# EAGLE board SparkFun_dToF-TMF8820_Mini-Panel (EAGLE 9.6.2), part 1 of 7
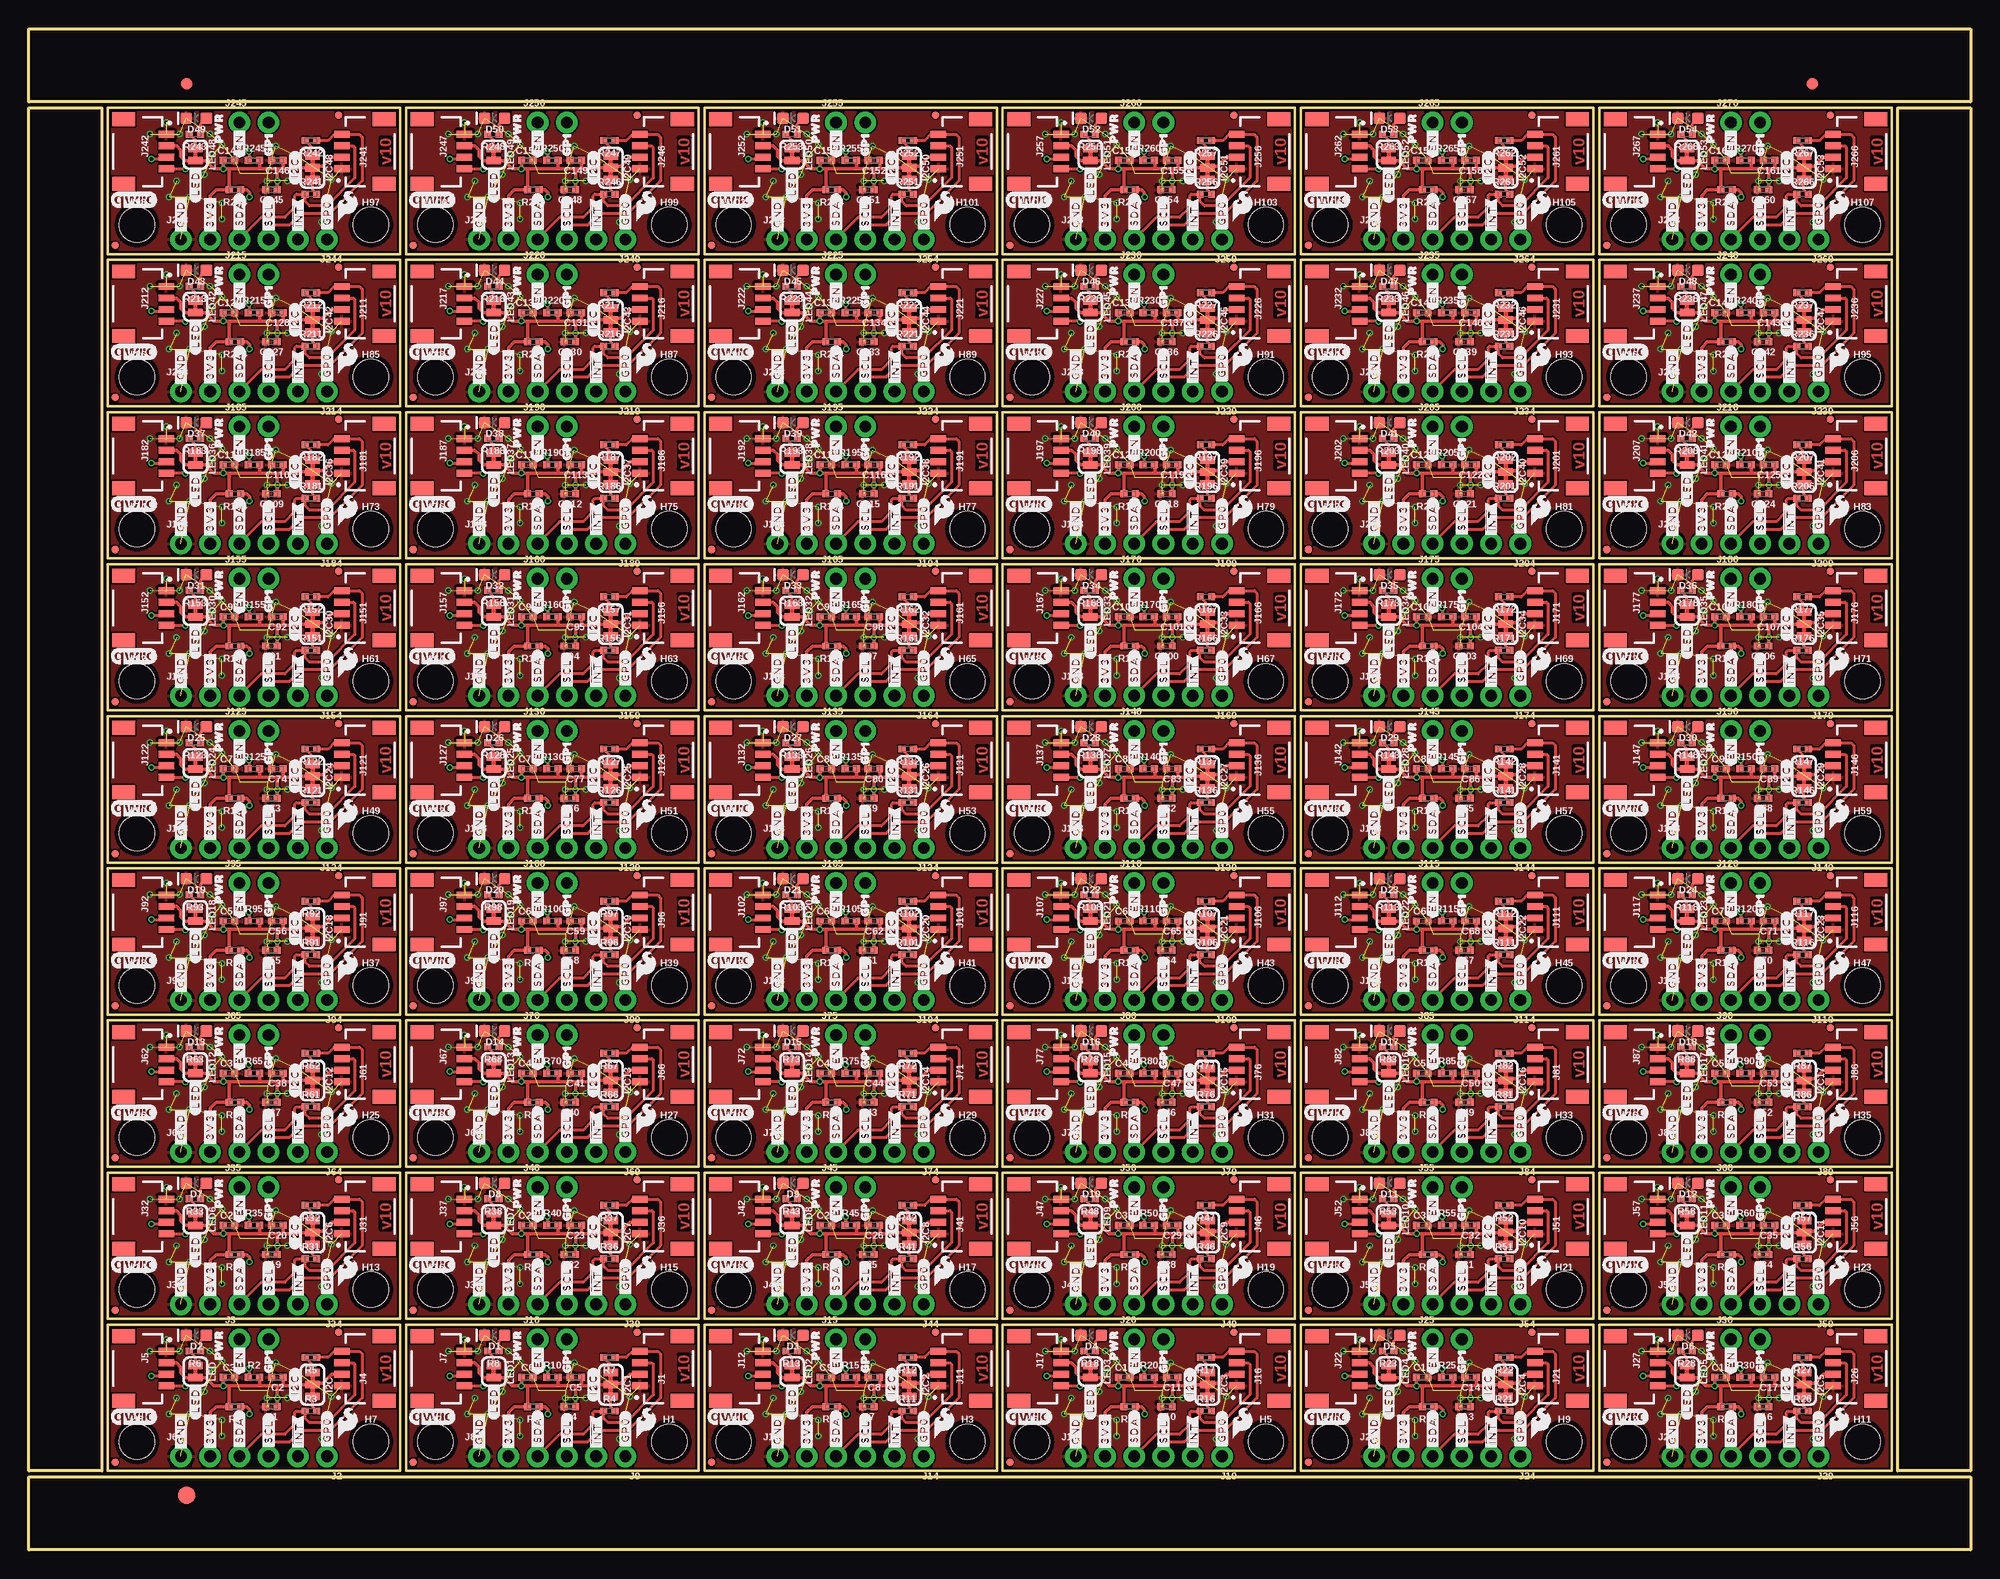
[diagram p0: board, top side]
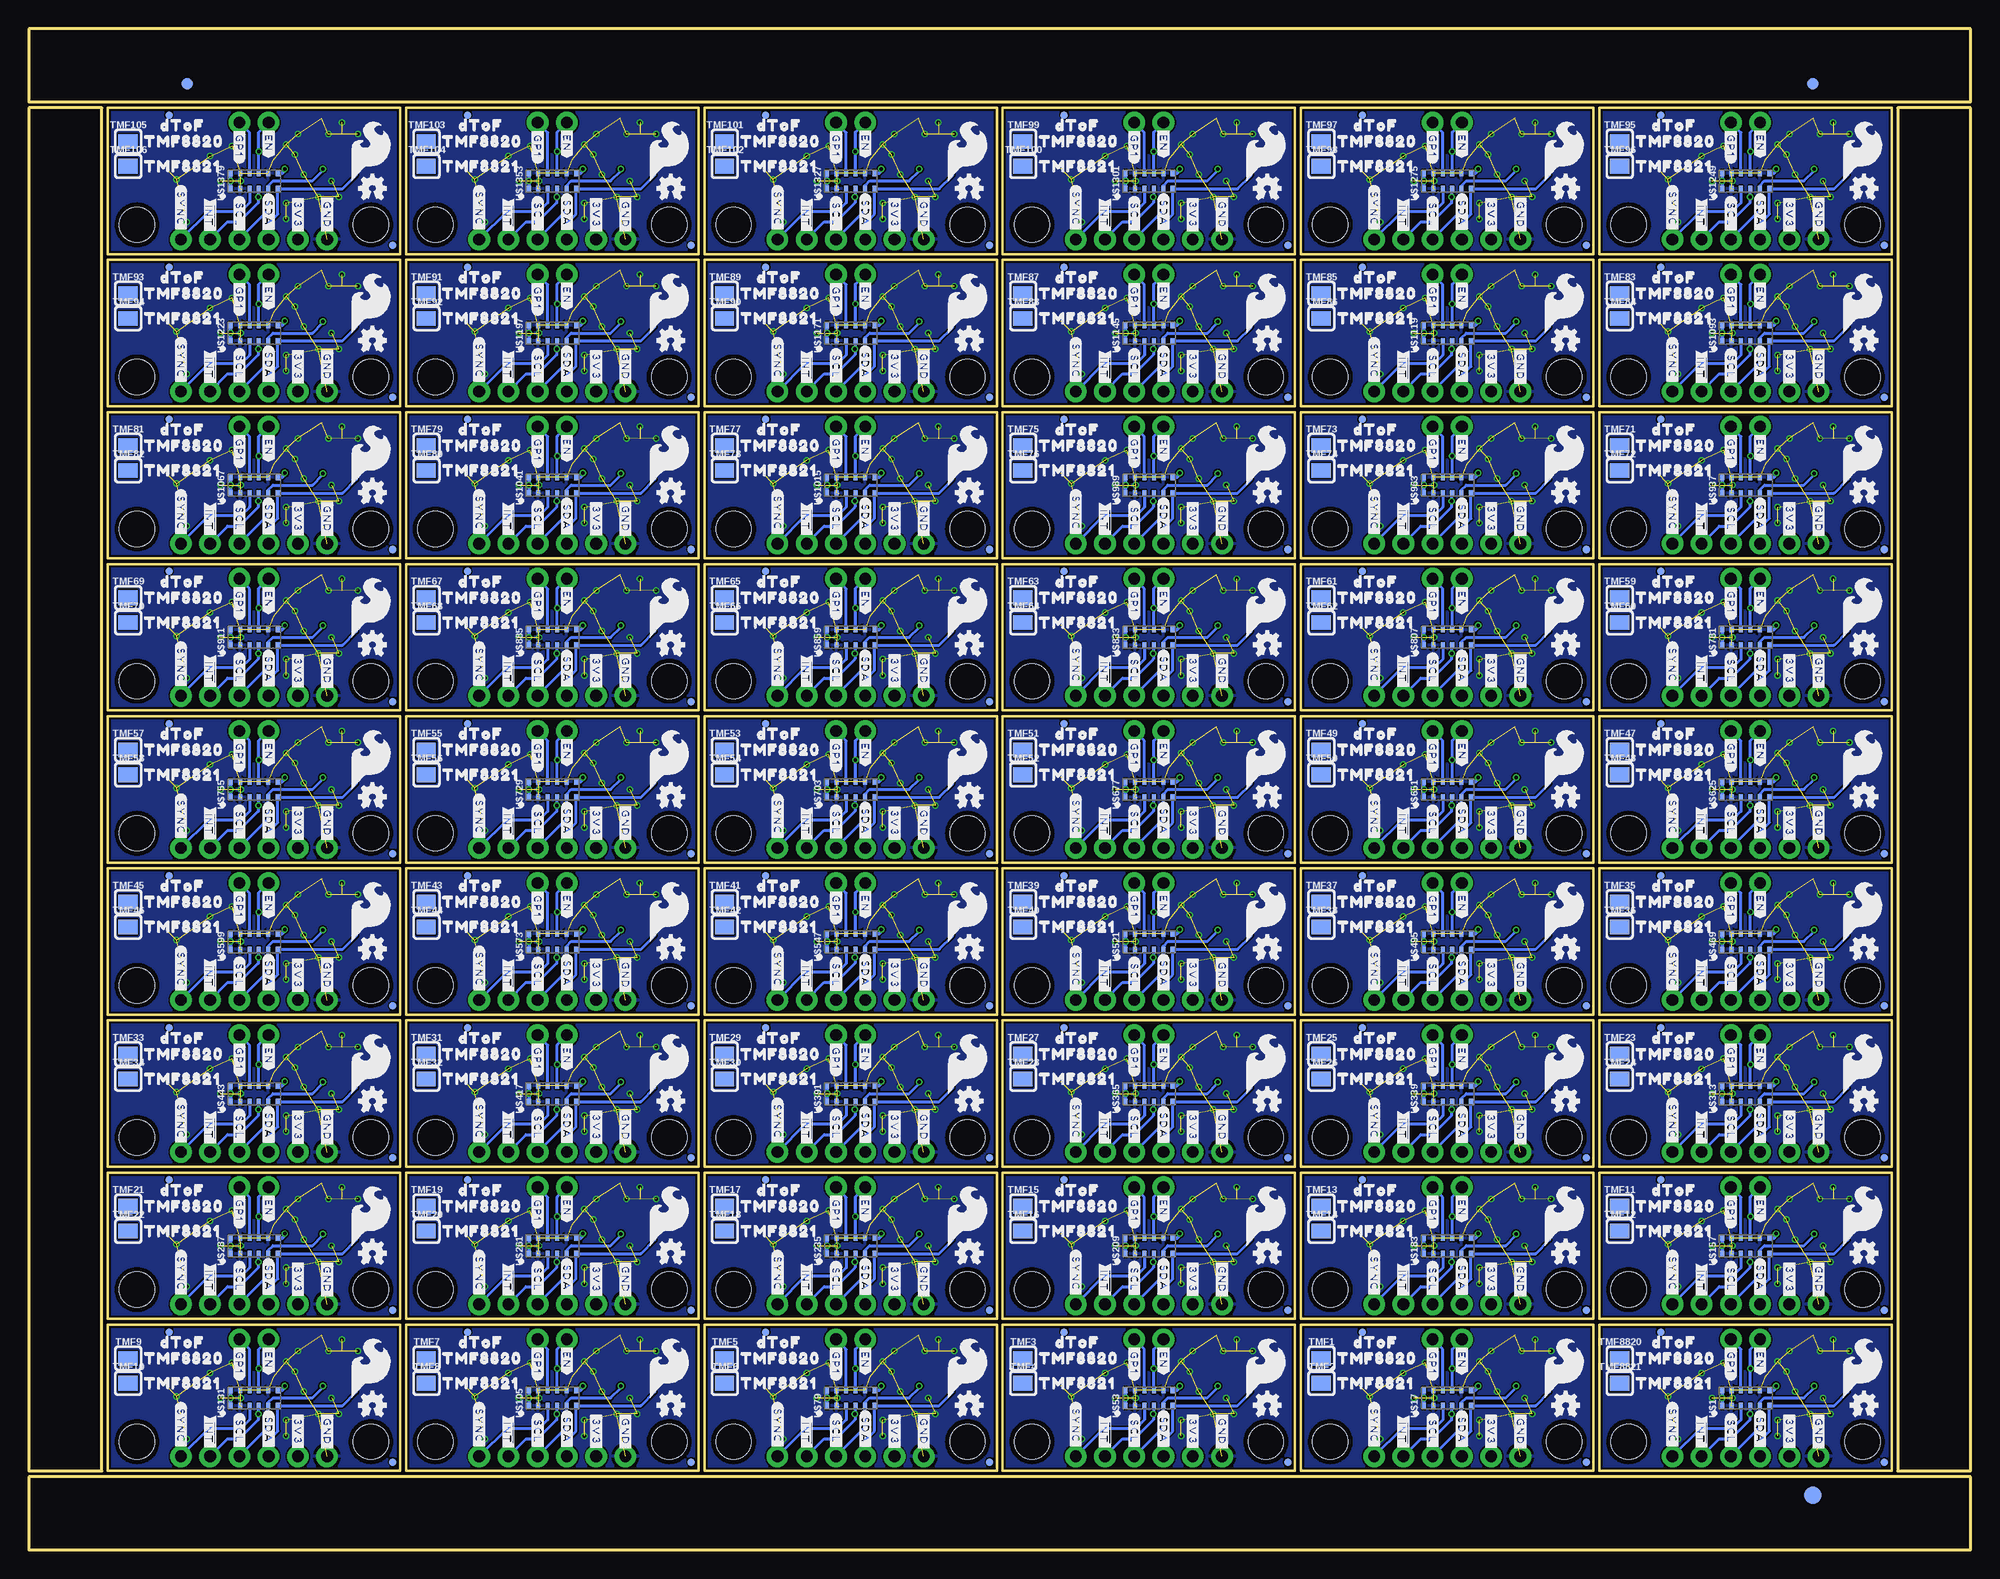
[diagram p1: board, bottom side, seen from below]

Size 168.66 x 132.08 mm. Coordinates in mm from the lower left corner, seen from the top.
Outline: 232 segments
Copper layers (1*16): Top 0.035mm / dielectric 1.5mm / Bottom 0.035mm
Design rules "SparkFun_tDof-TMF8820_Mini": minimum track width 5mil, minimum drill 0.3mm, track to track 5mil, track to pad 5mil, pad to pad 5mil, via to via 5mil, smd to smd 5mil, copper to edge 7mil, drill to drill 7mil, minimum pad ring 5mil, minimum via ring 5mil, stop-mask expansion 2.5mil, vias tented up to drill 25mil, thermal gap 10mil

## Footprints (pad centres in the part's own frame; a part is rotated, then mirrored left to right if it is on the bottom)
0402-TIGHT = smd 0.6 x 0.6: 1 -0.5,0; 2 0.5,0
LED-0603 = smd 1 x 1: A -0.877,0; C 0.877,0
FIDUCIAL-1X2 = smd 1 x 1: 1 0,0
FIDUCIAL-1.5X3 = smd 1.5 x 1.5: 1 0,0
FIDUCIAL-MICRO = smd 0.635 x 0.635: 1 0,0
STAND-OFF-TIGHT = hole 3.048: 0,0
SMT-JUMPER_3_2-NC_TRACE_SILK = smd 0.66 x 1.27: 1 -1.041,0; 2 0,0; 3 1.041,0
JST04_1MM_RA = smd 0.6 x 1.35: 1 -1.5,0; 2 -0.5,0; 3 0.5,0; 4 1.5,0 | smd 1.2 x 2: NC1 2.8,-3.675; NC2 -2.8,-3.675
1X02_NO_SILK = drill 1.016 pad 1.88: 1 0,0; 2 2.54,0
1X04_NO_SILK = drill 1.016 pad 1.88: 1 0,0; 2 2.54,0; 3 5.08,0; 4 7.62,0
SMT-JUMPER_2_NC_TRACE_SILK = smd 0.66 x 1.27: 1 -0.521,0; 2 0.521,0
PRODUCT_IDENT_PASTE_SILK = smd 1.676 x 1.27: 1 -0.025,0
PRODUCT_IDENT_NO_SILK = smd 1.676 x 1.27: 1 -0.025,0
TMF882X = smd 0.5 x 0.35: P1 -0.686,2.032; P2 -0.686,1.212; P3 -0.686,0.392; P4 -0.686,-0.428; P5 -0.686,-1.248; P6 -0.686,-2.068; P7 0.664,-2.068; P8 0.664,-1.248; P9 0.664,-0.428; P10 0.664,0.392; P11 0.664,1.212; P12 0.664,2.032

## Placement (x,y rotation side)
C1  0.1uF  [0402-TIGHT]  21.08,12.45 180 top
C2  0.1uF  [0402-TIGHT]  21.59,14.99 180 top
C3  0.1uF  [0402-TIGHT]  17.4,14.99 0 top
C4  0.1uF  [0402-TIGHT]  46.99,12.45 180 top
C5  0.1uF  [0402-TIGHT]  47.5,14.99 180 top
C6  0.1uF  [0402-TIGHT]  43.31,14.99 0 top
C7  0.1uF  [0402-TIGHT]  72.9,12.45 180 top
C8  0.1uF  [0402-TIGHT]  73.41,14.99 180 top
C9  0.1uF  [0402-TIGHT]  69.22,14.99 0 top
C10  0.1uF  [0402-TIGHT]  98.81,12.45 180 top
C11  0.1uF  [0402-TIGHT]  99.31,14.99 180 top
C12  0.1uF  [0402-TIGHT]  95.12,14.99 0 top
C13  0.1uF  [0402-TIGHT]  124.71,12.45 180 top
C14  0.1uF  [0402-TIGHT]  125.22,14.99 180 top
C15  0.1uF  [0402-TIGHT]  121.03,14.99 0 top
C16  0.1uF  [0402-TIGHT]  150.62,12.45 180 top
C17  0.1uF  [0402-TIGHT]  151.13,14.99 180 top
C18  0.1uF  [0402-TIGHT]  146.94,14.99 0 top
C19  0.1uF  [0402-TIGHT]  21.08,25.65 180 top
C20  0.1uF  [0402-TIGHT]  21.59,28.19 180 top
C21  0.1uF  [0402-TIGHT]  17.4,28.19 0 top
C22  0.1uF  [0402-TIGHT]  46.99,25.65 180 top
C23  0.1uF  [0402-TIGHT]  47.5,28.19 180 top
C24  0.1uF  [0402-TIGHT]  43.31,28.19 0 top
C25  0.1uF  [0402-TIGHT]  72.9,25.65 180 top
C26  0.1uF  [0402-TIGHT]  73.41,28.19 180 top
C27  0.1uF  [0402-TIGHT]  69.22,28.19 0 top
C28  0.1uF  [0402-TIGHT]  98.81,25.65 180 top
C29  0.1uF  [0402-TIGHT]  99.31,28.19 180 top
C30  0.1uF  [0402-TIGHT]  95.12,28.19 0 top
C31  0.1uF  [0402-TIGHT]  124.71,25.65 180 top
C32  0.1uF  [0402-TIGHT]  125.22,28.19 180 top
C33  0.1uF  [0402-TIGHT]  121.03,28.19 0 top
C34  0.1uF  [0402-TIGHT]  150.62,25.65 180 top
C35  0.1uF  [0402-TIGHT]  151.13,28.19 180 top
C36  0.1uF  [0402-TIGHT]  146.94,28.19 0 top
C37  0.1uF  [0402-TIGHT]  21.08,38.86 180 top
C38  0.1uF  [0402-TIGHT]  21.59,41.4 180 top
C39  0.1uF  [0402-TIGHT]  17.4,41.4 0 top
C40  0.1uF  [0402-TIGHT]  46.99,38.86 180 top
C41  0.1uF  [0402-TIGHT]  47.5,41.4 180 top
C42  0.1uF  [0402-TIGHT]  43.31,41.4 0 top
C43  0.1uF  [0402-TIGHT]  72.9,38.86 180 top
C44  0.1uF  [0402-TIGHT]  73.41,41.4 180 top
C45  0.1uF  [0402-TIGHT]  69.22,41.4 0 top
C46  0.1uF  [0402-TIGHT]  98.81,38.86 180 top
C47  0.1uF  [0402-TIGHT]  99.31,41.4 180 top
C48  0.1uF  [0402-TIGHT]  95.12,41.4 0 top
C49  0.1uF  [0402-TIGHT]  124.71,38.86 180 top
C50  0.1uF  [0402-TIGHT]  125.22,41.4 180 top
C51  0.1uF  [0402-TIGHT]  121.03,41.4 0 top
C52  0.1uF  [0402-TIGHT]  150.62,38.86 180 top
C53  0.1uF  [0402-TIGHT]  151.13,41.4 180 top
C54  0.1uF  [0402-TIGHT]  146.94,41.4 0 top
C55  0.1uF  [0402-TIGHT]  21.08,52.07 180 top
C56  0.1uF  [0402-TIGHT]  21.59,54.61 180 top
C57  0.1uF  [0402-TIGHT]  17.4,54.61 0 top
C58  0.1uF  [0402-TIGHT]  46.99,52.07 180 top
C59  0.1uF  [0402-TIGHT]  47.5,54.61 180 top
C60  0.1uF  [0402-TIGHT]  43.31,54.61 0 top
C61  0.1uF  [0402-TIGHT]  72.9,52.07 180 top
C62  0.1uF  [0402-TIGHT]  73.41,54.61 180 top
C63  0.1uF  [0402-TIGHT]  69.22,54.61 0 top
C64  0.1uF  [0402-TIGHT]  98.81,52.07 180 top
C65  0.1uF  [0402-TIGHT]  99.31,54.61 180 top
C66  0.1uF  [0402-TIGHT]  95.12,54.61 0 top
C67  0.1uF  [0402-TIGHT]  124.71,52.07 180 top
C68  0.1uF  [0402-TIGHT]  125.22,54.61 180 top
C69  0.1uF  [0402-TIGHT]  121.03,54.61 0 top
C70  0.1uF  [0402-TIGHT]  150.62,52.07 180 top
C71  0.1uF  [0402-TIGHT]  151.13,54.61 180 top
C72  0.1uF  [0402-TIGHT]  146.94,54.61 0 top
C73  0.1uF  [0402-TIGHT]  21.08,65.28 180 top
C74  0.1uF  [0402-TIGHT]  21.59,67.82 180 top
C75  0.1uF  [0402-TIGHT]  17.4,67.82 0 top
C76  0.1uF  [0402-TIGHT]  46.99,65.28 180 top
C77  0.1uF  [0402-TIGHT]  47.5,67.82 180 top
C78  0.1uF  [0402-TIGHT]  43.31,67.82 0 top
C79  0.1uF  [0402-TIGHT]  72.9,65.28 180 top
C80  0.1uF  [0402-TIGHT]  73.41,67.82 180 top
C81  0.1uF  [0402-TIGHT]  69.22,67.82 0 top
C82  0.1uF  [0402-TIGHT]  98.81,65.28 180 top
C83  0.1uF  [0402-TIGHT]  99.31,67.82 180 top
C84  0.1uF  [0402-TIGHT]  95.12,67.82 0 top
C85  0.1uF  [0402-TIGHT]  124.71,65.28 180 top
C86  0.1uF  [0402-TIGHT]  125.22,67.82 180 top
C87  0.1uF  [0402-TIGHT]  121.03,67.82 0 top
C88  0.1uF  [0402-TIGHT]  150.62,65.28 180 top
C89  0.1uF  [0402-TIGHT]  151.13,67.82 180 top
C90  0.1uF  [0402-TIGHT]  146.94,67.82 0 top
C91  0.1uF  [0402-TIGHT]  21.08,78.49 180 top
C92  0.1uF  [0402-TIGHT]  21.59,81.03 180 top
C93  0.1uF  [0402-TIGHT]  17.4,81.03 0 top
C94  0.1uF  [0402-TIGHT]  46.99,78.49 180 top
C95  0.1uF  [0402-TIGHT]  47.5,81.03 180 top
C96  0.1uF  [0402-TIGHT]  43.31,81.03 0 top
C97  0.1uF  [0402-TIGHT]  72.9,78.49 180 top
C98  0.1uF  [0402-TIGHT]  73.41,81.03 180 top
C99  0.1uF  [0402-TIGHT]  69.22,81.03 0 top
C100  0.1uF  [0402-TIGHT]  98.81,78.49 180 top
C101  0.1uF  [0402-TIGHT]  99.31,81.03 180 top
C102  0.1uF  [0402-TIGHT]  95.12,81.03 0 top
C103  0.1uF  [0402-TIGHT]  124.71,78.49 180 top
C104  0.1uF  [0402-TIGHT]  125.22,81.03 180 top
C105  0.1uF  [0402-TIGHT]  121.03,81.03 0 top
C106  0.1uF  [0402-TIGHT]  150.62,78.49 180 top
C107  0.1uF  [0402-TIGHT]  151.13,81.03 180 top
C108  0.1uF  [0402-TIGHT]  146.94,81.03 0 top
C109  0.1uF  [0402-TIGHT]  21.08,91.69 180 top
C110  0.1uF  [0402-TIGHT]  21.59,94.23 180 top
C111  0.1uF  [0402-TIGHT]  17.4,94.23 0 top
C112  0.1uF  [0402-TIGHT]  46.99,91.69 180 top
C113  0.1uF  [0402-TIGHT]  47.5,94.23 180 top
C114  0.1uF  [0402-TIGHT]  43.31,94.23 0 top
C115  0.1uF  [0402-TIGHT]  72.9,91.69 180 top
C116  0.1uF  [0402-TIGHT]  73.41,94.23 180 top
C117  0.1uF  [0402-TIGHT]  69.22,94.23 0 top
C118  0.1uF  [0402-TIGHT]  98.81,91.69 180 top
C119  0.1uF  [0402-TIGHT]  99.31,94.23 180 top
C120  0.1uF  [0402-TIGHT]  95.12,94.23 0 top
C121  0.1uF  [0402-TIGHT]  124.71,91.69 180 top
C122  0.1uF  [0402-TIGHT]  125.22,94.23 180 top
C123  0.1uF  [0402-TIGHT]  121.03,94.23 0 top
C124  0.1uF  [0402-TIGHT]  150.62,91.69 180 top
C125  0.1uF  [0402-TIGHT]  151.13,94.23 180 top
C126  0.1uF  [0402-TIGHT]  146.94,94.23 0 top
C127  0.1uF  [0402-TIGHT]  21.08,104.9 180 top
C128  0.1uF  [0402-TIGHT]  21.59,107.44 180 top
C129  0.1uF  [0402-TIGHT]  17.4,107.44 0 top
C130  0.1uF  [0402-TIGHT]  46.99,104.9 180 top
C131  0.1uF  [0402-TIGHT]  47.5,107.44 180 top
C132  0.1uF  [0402-TIGHT]  43.31,107.44 0 top
C133  0.1uF  [0402-TIGHT]  72.9,104.9 180 top
C134  0.1uF  [0402-TIGHT]  73.41,107.44 180 top
C135  0.1uF  [0402-TIGHT]  69.22,107.44 0 top
C136  0.1uF  [0402-TIGHT]  98.81,104.9 180 top
C137  0.1uF  [0402-TIGHT]  99.31,107.44 180 top
C138  0.1uF  [0402-TIGHT]  95.12,107.44 0 top
C139  0.1uF  [0402-TIGHT]  124.71,104.9 180 top
C140  0.1uF  [0402-TIGHT]  125.22,107.44 180 top
C141  0.1uF  [0402-TIGHT]  121.03,107.44 0 top
C142  0.1uF  [0402-TIGHT]  150.62,104.9 180 top
C143  0.1uF  [0402-TIGHT]  151.13,107.44 180 top
C144  0.1uF  [0402-TIGHT]  146.94,107.44 0 top
C145  0.1uF  [0402-TIGHT]  21.08,118.11 180 top
C146  0.1uF  [0402-TIGHT]  21.59,120.65 180 top
C147  0.1uF  [0402-TIGHT]  17.4,120.65 0 top
C148  0.1uF  [0402-TIGHT]  46.99,118.11 180 top
C149  0.1uF  [0402-TIGHT]  47.5,120.65 180 top
C150  0.1uF  [0402-TIGHT]  43.31,120.65 0 top
C151  0.1uF  [0402-TIGHT]  72.9,118.11 180 top
C152  0.1uF  [0402-TIGHT]  73.41,120.65 180 top
C153  0.1uF  [0402-TIGHT]  69.22,120.65 0 top
C154  0.1uF  [0402-TIGHT]  98.81,118.11 180 top
C155  0.1uF  [0402-TIGHT]  99.31,120.65 180 top
C156  0.1uF  [0402-TIGHT]  95.12,120.65 0 top
C157  0.1uF  [0402-TIGHT]  124.71,118.11 180 top
C158  0.1uF  [0402-TIGHT]  125.22,120.65 180 top
C159  0.1uF  [0402-TIGHT]  121.03,120.65 0 top
C160  0.1uF  [0402-TIGHT]  150.62,118.11 180 top
C161  0.1uF  [0402-TIGHT]  151.13,120.65 180 top
C162  0.1uF  [0402-TIGHT]  146.94,120.65 0 top
D1  RED  [LED-0603]  40.46,18.64 180 top
D2  RED  [LED-0603]  14.55,18.64 180 top
D3  RED  [LED-0603]  66.37,18.64 180 top
D4  RED  [LED-0603]  92.28,18.64 180 top
D5  RED  [LED-0603]  118.19,18.64 180 top
D6  RED  [LED-0603]  144.09,18.64 180 top
D7  RED  [LED-0603]  14.55,31.85 180 top
D8  RED  [LED-0603]  40.46,31.85 180 top
D9  RED  [LED-0603]  66.37,31.85 180 top
D10  RED  [LED-0603]  92.28,31.85 180 top
D11  RED  [LED-0603]  118.19,31.85 180 top
D12  RED  [LED-0603]  144.09,31.85 180 top
D13  RED  [LED-0603]  14.55,45.06 180 top
D14  RED  [LED-0603]  40.46,45.06 180 top
D15  RED  [LED-0603]  66.37,45.06 180 top
D16  RED  [LED-0603]  92.28,45.06 180 top
D17  RED  [LED-0603]  118.19,45.06 180 top
D18  RED  [LED-0603]  144.09,45.06 180 top
D19  RED  [LED-0603]  14.55,58.27 180 top
D20  RED  [LED-0603]  40.46,58.27 180 top
D21  RED  [LED-0603]  66.37,58.27 180 top
D22  RED  [LED-0603]  92.28,58.27 180 top
D23  RED  [LED-0603]  118.19,58.27 180 top
D24  RED  [LED-0603]  144.09,58.27 180 top
D25  RED  [LED-0603]  14.55,71.48 180 top
D26  RED  [LED-0603]  40.46,71.48 180 top
D27  RED  [LED-0603]  66.37,71.48 180 top
D28  RED  [LED-0603]  92.28,71.48 180 top
D29  RED  [LED-0603]  118.19,71.48 180 top
D30  RED  [LED-0603]  144.09,71.48 180 top
D31  RED  [LED-0603]  14.55,84.68 180 top
D32  RED  [LED-0603]  40.46,84.68 180 top
D33  RED  [LED-0603]  66.37,84.68 180 top
D34  RED  [LED-0603]  92.28,84.68 180 top
D35  RED  [LED-0603]  118.19,84.68 180 top
D36  RED  [LED-0603]  144.09,84.68 180 top
D37  RED  [LED-0603]  14.55,97.89 180 top
D38  RED  [LED-0603]  40.46,97.89 180 top
D39  RED  [LED-0603]  66.37,97.89 180 top
D40  RED  [LED-0603]  92.28,97.89 180 top
D41  RED  [LED-0603]  118.19,97.89 180 top
D42  RED  [LED-0603]  144.09,97.89 180 top
D43  RED  [LED-0603]  14.55,111.1 180 top
D44  RED  [LED-0603]  40.46,111.1 180 top
D45  RED  [LED-0603]  66.37,111.1 180 top
D46  RED  [LED-0603]  92.28,111.1 180 top
D47  RED  [LED-0603]  118.19,111.1 180 top
D48  RED  [LED-0603]  144.09,111.1 180 top
D49  RED  [LED-0603]  14.55,124.31 180 top
D50  RED  [LED-0603]  40.46,124.31 180 top
D51  RED  [LED-0603]  66.37,124.31 180 top
D52  RED  [LED-0603]  92.28,124.31 180 top
D53  RED  [LED-0603]  118.19,124.31 180 top
D54  RED  [LED-0603]  144.09,124.31 180 top
E$1  [FIDUCIAL-1X2]  13.72,127.32 0 top
E$2  [FIDUCIAL-1X2]  13.72,127.32 0 bottom
E$3  [FIDUCIAL-1X2]  154.88,127.32 0 top
E$4  [FIDUCIAL-1X2]  154.88,127.32 0 bottom
E$5  [FIDUCIAL-1.5X3]  13.72,4.76 0 top
E$6  [FIDUCIAL-1.5X3]  13.72,4.76 0 bottom
FD1  FIDUCIALUFIDUCIAL  [FIDUCIAL-MICRO]  52.83,18.92 0 bottom
FD2  FIDUCIALUFIDUCIAL  [FIDUCIAL-MICRO]  33.4,7.62 0 bottom
FD3  FIDUCIALUFIDUCIAL  [FIDUCIAL-MICRO]  33.4,7.62 0 top
FD4  FIDUCIALUFIDUCIAL  [FIDUCIAL-MICRO]  52.83,18.92 0 top
FD5  FIDUCIALUFIDUCIAL  [FIDUCIAL-MICRO]  26.92,18.92 0 bottom
FD6  FIDUCIALUFIDUCIAL  [FIDUCIAL-MICRO]  7.49,7.62 0 bottom
FD7  FIDUCIALUFIDUCIAL  [FIDUCIAL-MICRO]  7.49,7.62 0 top
FD8  FIDUCIALUFIDUCIAL  [FIDUCIAL-MICRO]  26.92,18.92 0 top
FD9  FIDUCIALUFIDUCIAL  [FIDUCIAL-MICRO]  78.74,18.92 0 bottom
FD10  FIDUCIALUFIDUCIAL  [FIDUCIAL-MICRO]  59.31,7.62 0 bottom
FD11  FIDUCIALUFIDUCIAL  [FIDUCIAL-MICRO]  59.31,7.62 0 top
FD12  FIDUCIALUFIDUCIAL  [FIDUCIAL-MICRO]  78.74,18.92 0 top
FD13  FIDUCIALUFIDUCIAL  [FIDUCIAL-MICRO]  104.65,18.92 0 bottom
FD14  FIDUCIALUFIDUCIAL  [FIDUCIAL-MICRO]  85.22,7.62 0 bottom
FD15  FIDUCIALUFIDUCIAL  [FIDUCIAL-MICRO]  85.22,7.62 0 top
FD16  FIDUCIALUFIDUCIAL  [FIDUCIAL-MICRO]  104.65,18.92 0 top
FD17  FIDUCIALUFIDUCIAL  [FIDUCIAL-MICRO]  130.56,18.92 0 bottom
FD18  FIDUCIALUFIDUCIAL  [FIDUCIAL-MICRO]  111.12,7.62 0 bottom
FD19  FIDUCIALUFIDUCIAL  [FIDUCIAL-MICRO]  111.12,7.62 0 top
FD20  FIDUCIALUFIDUCIAL  [FIDUCIAL-MICRO]  130.56,18.92 0 top
FD21  FIDUCIALUFIDUCIAL  [FIDUCIAL-MICRO]  156.46,18.92 0 bottom
FD22  FIDUCIALUFIDUCIAL  [FIDUCIAL-MICRO]  137.03,7.62 0 bottom
FD23  FIDUCIALUFIDUCIAL  [FIDUCIAL-MICRO]  137.03,7.62 0 top
FD24  FIDUCIALUFIDUCIAL  [FIDUCIAL-MICRO]  156.46,18.92 0 top
FD25  FIDUCIALUFIDUCIAL  [FIDUCIAL-MICRO]  26.92,32.13 0 bottom
FD26  FIDUCIALUFIDUCIAL  [FIDUCIAL-MICRO]  7.49,20.83 0 bottom
FD27  FIDUCIALUFIDUCIAL  [FIDUCIAL-MICRO]  7.49,20.83 0 top
FD28  FIDUCIALUFIDUCIAL  [FIDUCIAL-MICRO]  26.92,32.13 0 top
FD29  FIDUCIALUFIDUCIAL  [FIDUCIAL-MICRO]  52.83,32.13 0 bottom
FD30  FIDUCIALUFIDUCIAL  [FIDUCIAL-MICRO]  33.4,20.83 0 bottom
FD31  FIDUCIALUFIDUCIAL  [FIDUCIAL-MICRO]  33.4,20.83 0 top
FD32  FIDUCIALUFIDUCIAL  [FIDUCIAL-MICRO]  52.83,32.13 0 top
FD33  FIDUCIALUFIDUCIAL  [FIDUCIAL-MICRO]  78.74,32.13 0 bottom
FD34  FIDUCIALUFIDUCIAL  [FIDUCIAL-MICRO]  59.31,20.83 0 bottom
FD35  FIDUCIALUFIDUCIAL  [FIDUCIAL-MICRO]  59.31,20.83 0 top
FD36  FIDUCIALUFIDUCIAL  [FIDUCIAL-MICRO]  78.74,32.13 0 top
FD37  FIDUCIALUFIDUCIAL  [FIDUCIAL-MICRO]  104.65,32.13 0 bottom
FD38  FIDUCIALUFIDUCIAL  [FIDUCIAL-MICRO]  85.22,20.83 0 bottom
FD39  FIDUCIALUFIDUCIAL  [FIDUCIAL-MICRO]  85.22,20.83 0 top
FD40  FIDUCIALUFIDUCIAL  [FIDUCIAL-MICRO]  104.65,32.13 0 top
FD41  FIDUCIALUFIDUCIAL  [FIDUCIAL-MICRO]  130.56,32.13 0 bottom
FD42  FIDUCIALUFIDUCIAL  [FIDUCIAL-MICRO]  111.12,20.83 0 bottom
FD43  FIDUCIALUFIDUCIAL  [FIDUCIAL-MICRO]  111.12,20.83 0 top
FD44  FIDUCIALUFIDUCIAL  [FIDUCIAL-MICRO]  130.56,32.13 0 top
FD45  FIDUCIALUFIDUCIAL  [FIDUCIAL-MICRO]  156.46,32.13 0 bottom
FD46  FIDUCIALUFIDUCIAL  [FIDUCIAL-MICRO]  137.03,20.83 0 bottom
FD47  FIDUCIALUFIDUCIAL  [FIDUCIAL-MICRO]  137.03,20.83 0 top
FD48  FIDUCIALUFIDUCIAL  [FIDUCIAL-MICRO]  156.46,32.13 0 top
FD49  FIDUCIALUFIDUCIAL  [FIDUCIAL-MICRO]  26.92,45.34 0 bottom
FD50  FIDUCIALUFIDUCIAL  [FIDUCIAL-MICRO]  7.49,34.04 0 bottom
FD51  FIDUCIALUFIDUCIAL  [FIDUCIAL-MICRO]  7.49,34.04 0 top
FD52  FIDUCIALUFIDUCIAL  [FIDUCIAL-MICRO]  26.92,45.34 0 top
FD53  FIDUCIALUFIDUCIAL  [FIDUCIAL-MICRO]  52.83,45.34 0 bottom
FD54  FIDUCIALUFIDUCIAL  [FIDUCIAL-MICRO]  33.4,34.04 0 bottom
FD55  FIDUCIALUFIDUCIAL  [FIDUCIAL-MICRO]  33.4,34.04 0 top
FD56  FIDUCIALUFIDUCIAL  [FIDUCIAL-MICRO]  52.83,45.34 0 top
FD57  FIDUCIALUFIDUCIAL  [FIDUCIAL-MICRO]  78.74,45.34 0 bottom
FD58  FIDUCIALUFIDUCIAL  [FIDUCIAL-MICRO]  59.31,34.04 0 bottom
FD59  FIDUCIALUFIDUCIAL  [FIDUCIAL-MICRO]  59.31,34.04 0 top
FD60  FIDUCIALUFIDUCIAL  [FIDUCIAL-MICRO]  78.74,45.34 0 top
FD61  FIDUCIALUFIDUCIAL  [FIDUCIAL-MICRO]  104.65,45.34 0 bottom
FD62  FIDUCIALUFIDUCIAL  [FIDUCIAL-MICRO]  85.22,34.04 0 bottom
FD63  FIDUCIALUFIDUCIAL  [FIDUCIAL-MICRO]  85.22,34.04 0 top
FD64  FIDUCIALUFIDUCIAL  [FIDUCIAL-MICRO]  104.65,45.34 0 top
FD65  FIDUCIALUFIDUCIAL  [FIDUCIAL-MICRO]  130.56,45.34 0 bottom
FD66  FIDUCIALUFIDUCIAL  [FIDUCIAL-MICRO]  111.12,34.04 0 bottom
FD67  FIDUCIALUFIDUCIAL  [FIDUCIAL-MICRO]  111.12,34.04 0 top
FD68  FIDUCIALUFIDUCIAL  [FIDUCIAL-MICRO]  130.56,45.34 0 top
FD69  FIDUCIALUFIDUCIAL  [FIDUCIAL-MICRO]  156.46,45.34 0 bottom
FD70  FIDUCIALUFIDUCIAL  [FIDUCIAL-MICRO]  137.03,34.04 0 bottom
FD71  FIDUCIALUFIDUCIAL  [FIDUCIAL-MICRO]  137.03,34.04 0 top
FD72  FIDUCIALUFIDUCIAL  [FIDUCIAL-MICRO]  156.46,45.34 0 top
FD73  FIDUCIALUFIDUCIAL  [FIDUCIAL-MICRO]  26.92,58.55 0 bottom
FD74  FIDUCIALUFIDUCIAL  [FIDUCIAL-MICRO]  7.49,47.24 0 bottom
FD75  FIDUCIALUFIDUCIAL  [FIDUCIAL-MICRO]  7.49,47.24 0 top
FD76  FIDUCIALUFIDUCIAL  [FIDUCIAL-MICRO]  26.92,58.55 0 top
FD77  FIDUCIALUFIDUCIAL  [FIDUCIAL-MICRO]  52.83,58.55 0 bottom
FD78  FIDUCIALUFIDUCIAL  [FIDUCIAL-MICRO]  33.4,47.24 0 bottom
FD79  FIDUCIALUFIDUCIAL  [FIDUCIAL-MICRO]  33.4,47.24 0 top
FD80  FIDUCIALUFIDUCIAL  [FIDUCIAL-MICRO]  52.83,58.55 0 top
FD81  FIDUCIALUFIDUCIAL  [FIDUCIAL-MICRO]  78.74,58.55 0 bottom
FD82  FIDUCIALUFIDUCIAL  [FIDUCIAL-MICRO]  59.31,47.24 0 bottom
FD83  FIDUCIALUFIDUCIAL  [FIDUCIAL-MICRO]  59.31,47.24 0 top
FD84  FIDUCIALUFIDUCIAL  [FIDUCIAL-MICRO]  78.74,58.55 0 top
FD85  FIDUCIALUFIDUCIAL  [FIDUCIAL-MICRO]  104.65,58.55 0 bottom
FD86  FIDUCIALUFIDUCIAL  [FIDUCIAL-MICRO]  85.22,47.24 0 bottom
FD87  FIDUCIALUFIDUCIAL  [FIDUCIAL-MICRO]  85.22,47.24 0 top
FD88  FIDUCIALUFIDUCIAL  [FIDUCIAL-MICRO]  104.65,58.55 0 top
FD89  FIDUCIALUFIDUCIAL  [FIDUCIAL-MICRO]  130.56,58.55 0 bottom
FD90  FIDUCIALUFIDUCIAL  [FIDUCIAL-MICRO]  111.12,47.24 0 bottom
FD91  FIDUCIALUFIDUCIAL  [FIDUCIAL-MICRO]  111.12,47.24 0 top
FD92  FIDUCIALUFIDUCIAL  [FIDUCIAL-MICRO]  130.56,58.55 0 top
FD93  FIDUCIALUFIDUCIAL  [FIDUCIAL-MICRO]  156.46,58.55 0 bottom
FD94  FIDUCIALUFIDUCIAL  [FIDUCIAL-MICRO]  137.03,47.24 0 bottom
FD95  FIDUCIALUFIDUCIAL  [FIDUCIAL-MICRO]  137.03,47.24 0 top
FD96  FIDUCIALUFIDUCIAL  [FIDUCIAL-MICRO]  156.46,58.55 0 top
FD97  FIDUCIALUFIDUCIAL  [FIDUCIAL-MICRO]  26.92,71.76 0 bottom
FD98  FIDUCIALUFIDUCIAL  [FIDUCIAL-MICRO]  7.49,60.45 0 bottom
FD99  FIDUCIALUFIDUCIAL  [FIDUCIAL-MICRO]  7.49,60.45 0 top
FD100  FIDUCIALUFIDUCIAL  [FIDUCIAL-MICRO]  26.92,71.76 0 top
FD101  FIDUCIALUFIDUCIAL  [FIDUCIAL-MICRO]  52.83,71.76 0 bottom
FD102  FIDUCIALUFIDUCIAL  [FIDUCIAL-MICRO]  33.4,60.45 0 bottom
FD103  FIDUCIALUFIDUCIAL  [FIDUCIAL-MICRO]  33.4,60.45 0 top
FD104  FIDUCIALUFIDUCIAL  [FIDUCIAL-MICRO]  52.83,71.76 0 top
FD105  FIDUCIALUFIDUCIAL  [FIDUCIAL-MICRO]  78.74,71.76 0 bottom
FD106  FIDUCIALUFIDUCIAL  [FIDUCIAL-MICRO]  59.31,60.45 0 bottom
FD107  FIDUCIALUFIDUCIAL  [FIDUCIAL-MICRO]  59.31,60.45 0 top
FD108  FIDUCIALUFIDUCIAL  [FIDUCIAL-MICRO]  78.74,71.76 0 top
FD109  FIDUCIALUFIDUCIAL  [FIDUCIAL-MICRO]  104.65,71.76 0 bottom
FD110  FIDUCIALUFIDUCIAL  [FIDUCIAL-MICRO]  85.22,60.45 0 bottom
FD111  FIDUCIALUFIDUCIAL  [FIDUCIAL-MICRO]  85.22,60.45 0 top
FD112  FIDUCIALUFIDUCIAL  [FIDUCIAL-MICRO]  104.65,71.76 0 top
FD113  FIDUCIALUFIDUCIAL  [FIDUCIAL-MICRO]  130.56,71.76 0 bottom
FD114  FIDUCIALUFIDUCIAL  [FIDUCIAL-MICRO]  111.12,60.45 0 bottom
FD115  FIDUCIALUFIDUCIAL  [FIDUCIAL-MICRO]  111.12,60.45 0 top
FD116  FIDUCIALUFIDUCIAL  [FIDUCIAL-MICRO]  130.56,71.76 0 top
FD117  FIDUCIALUFIDUCIAL  [FIDUCIAL-MICRO]  156.46,71.76 0 bottom
FD118  FIDUCIALUFIDUCIAL  [FIDUCIAL-MICRO]  137.03,60.45 0 bottom
FD119  FIDUCIALUFIDUCIAL  [FIDUCIAL-MICRO]  137.03,60.45 0 top
FD120  FIDUCIALUFIDUCIAL  [FIDUCIAL-MICRO]  156.46,71.76 0 top
FD121  FIDUCIALUFIDUCIAL  [FIDUCIAL-MICRO]  26.92,84.96 0 bottom
FD122  FIDUCIALUFIDUCIAL  [FIDUCIAL-MICRO]  7.49,73.66 0 bottom
FD123  FIDUCIALUFIDUCIAL  [FIDUCIAL-MICRO]  7.49,73.66 0 top
FD124  FIDUCIALUFIDUCIAL  [FIDUCIAL-MICRO]  26.92,84.96 0 top
FD125  FIDUCIALUFIDUCIAL  [FIDUCIAL-MICRO]  52.83,84.96 0 bottom
FD126  FIDUCIALUFIDUCIAL  [FIDUCIAL-MICRO]  33.4,73.66 0 bottom
FD127  FIDUCIALUFIDUCIAL  [FIDUCIAL-MICRO]  33.4,73.66 0 top
FD128  FIDUCIALUFIDUCIAL  [FIDUCIAL-MICRO]  52.83,84.96 0 top
FD129  FIDUCIALUFIDUCIAL  [FIDUCIAL-MICRO]  78.74,84.96 0 bottom
FD130  FIDUCIALUFIDUCIAL  [FIDUCIAL-MICRO]  59.31,73.66 0 bottom
FD131  FIDUCIALUFIDUCIAL  [FIDUCIAL-MICRO]  59.31,73.66 0 top
FD132  FIDUCIALUFIDUCIAL  [FIDUCIAL-MICRO]  78.74,84.96 0 top
FD133  FIDUCIALUFIDUCIAL  [FIDUCIAL-MICRO]  104.65,84.96 0 bottom
FD134  FIDUCIALUFIDUCIAL  [FIDUCIAL-MICRO]  85.22,73.66 0 bottom
FD135  FIDUCIALUFIDUCIAL  [FIDUCIAL-MICRO]  85.22,73.66 0 top
FD136  FIDUCIALUFIDUCIAL  [FIDUCIAL-MICRO]  104.65,84.96 0 top
FD137  FIDUCIALUFIDUCIAL  [FIDUCIAL-MICRO]  130.56,84.96 0 bottom
FD138  FIDUCIALUFIDUCIAL  [FIDUCIAL-MICRO]  111.12,73.66 0 bottom
FD139  FIDUCIALUFIDUCIAL  [FIDUCIAL-MICRO]  111.12,73.66 0 top
FD140  FIDUCIALUFIDUCIAL  [FIDUCIAL-MICRO]  130.56,84.96 0 top
FD141  FIDUCIALUFIDUCIAL  [FIDUCIAL-MICRO]  156.46,84.96 0 bottom
FD142  FIDUCIALUFIDUCIAL  [FIDUCIAL-MICRO]  137.03,73.66 0 bottom
FD143  FIDUCIALUFIDUCIAL  [FIDUCIAL-MICRO]  137.03,73.66 0 top
FD144  FIDUCIALUFIDUCIAL  [FIDUCIAL-MICRO]  156.46,84.96 0 top
FD145  FIDUCIALUFIDUCIAL  [FIDUCIAL-MICRO]  26.92,98.17 0 bottom
FD146  FIDUCIALUFIDUCIAL  [FIDUCIAL-MICRO]  7.49,86.87 0 bottom
FD147  FIDUCIALUFIDUCIAL  [FIDUCIAL-MICRO]  7.49,86.87 0 top
FD148  FIDUCIALUFIDUCIAL  [FIDUCIAL-MICRO]  26.92,98.17 0 top
FD149  FIDUCIALUFIDUCIAL  [FIDUCIAL-MICRO]  52.83,98.17 0 bottom
FD150  FIDUCIALUFIDUCIAL  [FIDUCIAL-MICRO]  33.4,86.87 0 bottom
FD151  FIDUCIALUFIDUCIAL  [FIDUCIAL-MICRO]  33.4,86.87 0 top
FD152  FIDUCIALUFIDUCIAL  [FIDUCIAL-MICRO]  52.83,98.17 0 top
FD153  FIDUCIALUFIDUCIAL  [FIDUCIAL-MICRO]  78.74,98.17 0 bottom
FD154  FIDUCIALUFIDUCIAL  [FIDUCIAL-MICRO]  59.31,86.87 0 bottom
FD155  FIDUCIALUFIDUCIAL  [FIDUCIAL-MICRO]  59.31,86.87 0 top
FD156  FIDUCIALUFIDUCIAL  [FIDUCIAL-MICRO]  78.74,98.17 0 top
FD157  FIDUCIALUFIDUCIAL  [FIDUCIAL-MICRO]  104.65,98.17 0 bottom
FD158  FIDUCIALUFIDUCIAL  [FIDUCIAL-MICRO]  85.22,86.87 0 bottom
FD159  FIDUCIALUFIDUCIAL  [FIDUCIAL-MICRO]  85.22,86.87 0 top
FD160  FIDUCIALUFIDUCIAL  [FIDUCIAL-MICRO]  104.65,98.17 0 top
FD161  FIDUCIALUFIDUCIAL  [FIDUCIAL-MICRO]  130.56,98.17 0 bottom
FD162  FIDUCIALUFIDUCIAL  [FIDUCIAL-MICRO]  111.12,86.87 0 bottom
FD163  FIDUCIALUFIDUCIAL  [FIDUCIAL-MICRO]  111.12,86.87 0 top
FD164  FIDUCIALUFIDUCIAL  [FIDUCIAL-MICRO]  130.56,98.17 0 top
FD165  FIDUCIALUFIDUCIAL  [FIDUCIAL-MICRO]  156.46,98.17 0 bottom
FD166  FIDUCIALUFIDUCIAL  [FIDUCIAL-MICRO]  137.03,86.87 0 bottom
FD167  FIDUCIALUFIDUCIAL  [FIDUCIAL-MICRO]  137.03,86.87 0 top
FD168  FIDUCIALUFIDUCIAL  [FIDUCIAL-MICRO]  156.46,98.17 0 top
FD169  FIDUCIALUFIDUCIAL  [FIDUCIAL-MICRO]  26.92,111.38 0 bottom
FD170  FIDUCIALUFIDUCIAL  [FIDUCIAL-MICRO]  7.49,100.08 0 bottom
FD171  FIDUCIALUFIDUCIAL  [FIDUCIAL-MICRO]  7.49,100.08 0 top
FD172  FIDUCIALUFIDUCIAL  [FIDUCIAL-MICRO]  26.92,111.38 0 top
FD173  FIDUCIALUFIDUCIAL  [FIDUCIAL-MICRO]  52.83,111.38 0 bottom
FD174  FIDUCIALUFIDUCIAL  [FIDUCIAL-MICRO]  33.4,100.08 0 bottom
FD175  FIDUCIALUFIDUCIAL  [FIDUCIAL-MICRO]  33.4,100.08 0 top
FD176  FIDUCIALUFIDUCIAL  [FIDUCIAL-MICRO]  52.83,111.38 0 top
FD177  FIDUCIALUFIDUCIAL  [FIDUCIAL-MICRO]  78.74,111.38 0 bottom
FD178  FIDUCIALUFIDUCIAL  [FIDUCIAL-MICRO]  59.31,100.08 0 bottom
FD179  FIDUCIALUFIDUCIAL  [FIDUCIAL-MICRO]  59.31,100.08 0 top
FD180  FIDUCIALUFIDUCIAL  [FIDUCIAL-MICRO]  78.74,111.38 0 top
FD181  FIDUCIALUFIDUCIAL  [FIDUCIAL-MICRO]  104.65,111.38 0 bottom
FD182  FIDUCIALUFIDUCIAL  [FIDUCIAL-MICRO]  85.22,100.08 0 bottom
FD183  FIDUCIALUFIDUCIAL  [FIDUCIAL-MICRO]  85.22,100.08 0 top
FD184  FIDUCIALUFIDUCIAL  [FIDUCIAL-MICRO]  104.65,111.38 0 top
FD185  FIDUCIALUFIDUCIAL  [FIDUCIAL-MICRO]  130.56,111.38 0 bottom
FD186  FIDUCIALUFIDUCIAL  [FIDUCIAL-MICRO]  111.12,100.08 0 bottom
FD187  FIDUCIALUFIDUCIAL  [FIDUCIAL-MICRO]  111.12,100.08 0 top
FD188  FIDUCIALUFIDUCIAL  [FIDUCIAL-MICRO]  130.56,111.38 0 top
FD189  FIDUCIALUFIDUCIAL  [FIDUCIAL-MICRO]  156.46,111.38 0 bottom
FD190  FIDUCIALUFIDUCIAL  [FIDUCIAL-MICRO]  137.03,100.08 0 bottom
FD191  FIDUCIALUFIDUCIAL  [FIDUCIAL-MICRO]  137.03,100.08 0 top
FD192  FIDUCIALUFIDUCIAL  [FIDUCIAL-MICRO]  156.46,111.38 0 top
FD193  FIDUCIALUFIDUCIAL  [FIDUCIAL-MICRO]  26.92,124.59 0 bottom
FD194  FIDUCIALUFIDUCIAL  [FIDUCIAL-MICRO]  7.49,113.28 0 bottom
FD195  FIDUCIALUFIDUCIAL  [FIDUCIAL-MICRO]  7.49,113.28 0 top
FD196  FIDUCIALUFIDUCIAL  [FIDUCIAL-MICRO]  26.92,124.59 0 top
FD197  FIDUCIALUFIDUCIAL  [FIDUCIAL-MICRO]  52.83,124.59 0 bottom
FD198  FIDUCIALUFIDUCIAL  [FIDUCIAL-MICRO]  33.4,113.28 0 bottom
FD199  FIDUCIALUFIDUCIAL  [FIDUCIAL-MICRO]  33.4,113.28 0 top
FD200  FIDUCIALUFIDUCIAL  [FIDUCIAL-MICRO]  52.83,124.59 0 top
FD201  FIDUCIALUFIDUCIAL  [FIDUCIAL-MICRO]  78.74,124.59 0 bottom
FD202  FIDUCIALUFIDUCIAL  [FIDUCIAL-MICRO]  59.31,113.28 0 bottom
FD203  FIDUCIALUFIDUCIAL  [FIDUCIAL-MICRO]  59.31,113.28 0 top
FD204  FIDUCIALUFIDUCIAL  [FIDUCIAL-MICRO]  78.74,124.59 0 top
FD205  FIDUCIALUFIDUCIAL  [FIDUCIAL-MICRO]  104.65,124.59 0 bottom
FD206  FIDUCIALUFIDUCIAL  [FIDUCIAL-MICRO]  85.22,113.28 0 bottom
FD207  FIDUCIALUFIDUCIAL  [FIDUCIAL-MICRO]  85.22,113.28 0 top
FD208  FIDUCIALUFIDUCIAL  [FIDUCIAL-MICRO]  104.65,124.59 0 top
FD209  FIDUCIALUFIDUCIAL  [FIDUCIAL-MICRO]  130.56,124.59 0 bottom
FD210  FIDUCIALUFIDUCIAL  [FIDUCIAL-MICRO]  111.12,113.28 0 bottom
FD211  FIDUCIALUFIDUCIAL  [FIDUCIAL-MICRO]  111.12,113.28 0 top
FD212  FIDUCIALUFIDUCIAL  [FIDUCIAL-MICRO]  130.56,124.59 0 top
FD213  FIDUCIALUFIDUCIAL  [FIDUCIAL-MICRO]  156.46,124.59 0 bottom
FD214  FIDUCIALUFIDUCIAL  [FIDUCIAL-MICRO]  137.03,113.28 0 bottom
FD215  FIDUCIALUFIDUCIAL  [FIDUCIAL-MICRO]  137.03,113.28 0 top
FD216  FIDUCIALUFIDUCIAL  [FIDUCIAL-MICRO]  156.46,124.59 0 top
FRAME1  FRAME-LETTER  [CREATIVE_COMMONS]  20.83,-6.1 0 top  (outside the outline)
FRAME2  FRAME-LETTER  [CREATIVE_COMMONS]  -5.08,-6.1 0 top  (outside the outline)
FRAME3  FRAME-LETTER  [CREATIVE_COMMONS]  46.74,-6.1 0 top  (outside the outline)
FRAME4  FRAME-LETTER  [CREATIVE_COMMONS]  72.64,-6.1 0 top  (outside the outline)
FRAME5  FRAME-LETTER  [CREATIVE_COMMONS]  98.55,-6.1 0 top  (outside the outline)
FRAME6  FRAME-LETTER  [CREATIVE_COMMONS]  124.46,-6.1 0 top  (outside the outline)
FRAME7  FRAME-LETTER  [CREATIVE_COMMONS]  -5.08,7.11 0 top  (outside the outline)
FRAME8  FRAME-LETTER  [CREATIVE_COMMONS]  20.83,7.11 0 top
FRAME9  FRAME-LETTER  [CREATIVE_COMMONS]  46.74,7.11 0 top
FRAME10  FRAME-LETTER  [CREATIVE_COMMONS]  72.64,7.11 0 top
FRAME11  FRAME-LETTER  [CREATIVE_COMMONS]  98.55,7.11 0 top
FRAME12  FRAME-LETTER  [CREATIVE_COMMONS]  124.46,7.11 0 top
FRAME13  FRAME-LETTER  [CREATIVE_COMMONS]  -5.08,20.32 0 top  (outside the outline)
FRAME14  FRAME-LETTER  [CREATIVE_COMMONS]  20.83,20.32 0 top
FRAME15  FRAME-LETTER  [CREATIVE_COMMONS]  46.74,20.32 0 top
FRAME16  FRAME-LETTER  [CREATIVE_COMMONS]  72.64,20.32 0 top
FRAME17  FRAME-LETTER  [CREATIVE_COMMONS]  98.55,20.32 0 top
FRAME18  FRAME-LETTER  [CREATIVE_COMMONS]  124.46,20.32 0 top
FRAME19  FRAME-LETTER  [CREATIVE_COMMONS]  -5.08,33.53 0 top  (outside the outline)
FRAME20  FRAME-LETTER  [CREATIVE_COMMONS]  20.83,33.53 0 top
FRAME21  FRAME-LETTER  [CREATIVE_COMMONS]  46.74,33.53 0 top
FRAME22  FRAME-LETTER  [CREATIVE_COMMONS]  72.64,33.53 0 top
FRAME23  FRAME-LETTER  [CREATIVE_COMMONS]  98.55,33.53 0 top
FRAME24  FRAME-LETTER  [CREATIVE_COMMONS]  124.46,33.53 0 top
FRAME25  FRAME-LETTER  [CREATIVE_COMMONS]  -5.08,46.74 0 top  (outside the outline)
FRAME26  FRAME-LETTER  [CREATIVE_COMMONS]  20.83,46.74 0 top
FRAME27  FRAME-LETTER  [CREATIVE_COMMONS]  46.74,46.74 0 top
FRAME28  FRAME-LETTER  [CREATIVE_COMMONS]  72.64,46.74 0 top
FRAME29  FRAME-LETTER  [CREATIVE_COMMONS]  98.55,46.74 0 top
FRAME30  FRAME-LETTER  [CREATIVE_COMMONS]  124.46,46.74 0 top
FRAME31  FRAME-LETTER  [CREATIVE_COMMONS]  -5.08,59.94 0 top  (outside the outline)
FRAME32  FRAME-LETTER  [CREATIVE_COMMONS]  20.83,59.94 0 top
FRAME33  FRAME-LETTER  [CREATIVE_COMMONS]  46.74,59.94 0 top
FRAME34  FRAME-LETTER  [CREATIVE_COMMONS]  72.64,59.94 0 top
FRAME35  FRAME-LETTER  [CREATIVE_COMMONS]  98.55,59.94 0 top
FRAME36  FRAME-LETTER  [CREATIVE_COMMONS]  124.46,59.94 0 top
FRAME37  FRAME-LETTER  [CREATIVE_COMMONS]  -5.08,73.15 0 top  (outside the outline)
FRAME38  FRAME-LETTER  [CREATIVE_COMMONS]  20.83,73.15 0 top
FRAME39  FRAME-LETTER  [CREATIVE_COMMONS]  46.74,73.15 0 top
FRAME40  FRAME-LETTER  [CREATIVE_COMMONS]  72.64,73.15 0 top
FRAME41  FRAME-LETTER  [CREATIVE_COMMONS]  98.55,73.15 0 top
FRAME42  FRAME-LETTER  [CREATIVE_COMMONS]  124.46,73.15 0 top
FRAME43  FRAME-LETTER  [CREATIVE_COMMONS]  -5.08,86.36 0 top  (outside the outline)
FRAME44  FRAME-LETTER  [CREATIVE_COMMONS]  20.83,86.36 0 top
FRAME45  FRAME-LETTER  [CREATIVE_COMMONS]  46.74,86.36 0 top
FRAME46  FRAME-LETTER  [CREATIVE_COMMONS]  72.64,86.36 0 top
FRAME47  FRAME-LETTER  [CREATIVE_COMMONS]  98.55,86.36 0 top
FRAME48  FRAME-LETTER  [CREATIVE_COMMONS]  124.46,86.36 0 top
FRAME49  FRAME-LETTER  [CREATIVE_COMMONS]  -5.08,99.57 0 top  (outside the outline)
FRAME50  FRAME-LETTER  [CREATIVE_COMMONS]  20.83,99.57 0 top
FRAME51  FRAME-LETTER  [CREATIVE_COMMONS]  46.74,99.57 0 top
FRAME52  FRAME-LETTER  [CREATIVE_COMMONS]  72.64,99.57 0 top
FRAME53  FRAME-LETTER  [CREATIVE_COMMONS]  98.55,99.57 0 top
FRAME54  FRAME-LETTER  [CREATIVE_COMMONS]  124.46,99.57 0 top
H1  STAND-OFFTIGHT  [STAND-OFF-TIGHT]  55.63,9.4 0 top
H2  STAND-OFFTIGHT  [STAND-OFF-TIGHT]  35.31,9.4 0 top
H3  STAND-OFFTIGHT  [STAND-OFF-TIGHT]  81.53,9.4 0 top
H4  STAND-OFFTIGHT  [STAND-OFF-TIGHT]  61.21,9.4 0 top
H5  STAND-OFFTIGHT  [STAND-OFF-TIGHT]  107.44,9.4 0 top
H6  STAND-OFFTIGHT  [STAND-OFF-TIGHT]  87.12,9.4 0 top
H7  STAND-OFFTIGHT  [STAND-OFF-TIGHT]  29.72,9.4 0 top
H8  STAND-OFFTIGHT  [STAND-OFF-TIGHT]  9.4,9.4 0 top
H9  STAND-OFFTIGHT  [STAND-OFF-TIGHT]  133.35,9.4 0 top
H10  STAND-OFFTIGHT  [STAND-OFF-TIGHT]  113.03,9.4 0 top
H11  STAND-OFFTIGHT  [STAND-OFF-TIGHT]  159.26,9.4 0 top
H12  STAND-OFFTIGHT  [STAND-OFF-TIGHT]  138.94,9.4 0 top
H13  STAND-OFFTIGHT  [STAND-OFF-TIGHT]  29.72,22.61 0 top
H14  STAND-OFFTIGHT  [STAND-OFF-TIGHT]  9.4,22.61 0 top
H15  STAND-OFFTIGHT  [STAND-OFF-TIGHT]  55.63,22.61 0 top
H16  STAND-OFFTIGHT  [STAND-OFF-TIGHT]  35.31,22.61 0 top
H17  STAND-OFFTIGHT  [STAND-OFF-TIGHT]  81.53,22.61 0 top
H18  STAND-OFFTIGHT  [STAND-OFF-TIGHT]  61.21,22.61 0 top
H19  STAND-OFFTIGHT  [STAND-OFF-TIGHT]  107.44,22.61 0 top
H20  STAND-OFFTIGHT  [STAND-OFF-TIGHT]  87.12,22.61 0 top
H21  STAND-OFFTIGHT  [STAND-OFF-TIGHT]  133.35,22.61 0 top
H22  STAND-OFFTIGHT  [STAND-OFF-TIGHT]  113.03,22.61 0 top
H23  STAND-OFFTIGHT  [STAND-OFF-TIGHT]  159.26,22.61 0 top
H24  STAND-OFFTIGHT  [STAND-OFF-TIGHT]  138.94,22.61 0 top
H25  STAND-OFFTIGHT  [STAND-OFF-TIGHT]  29.72,35.81 0 top
H26  STAND-OFFTIGHT  [STAND-OFF-TIGHT]  9.4,35.81 0 top
H27  STAND-OFFTIGHT  [STAND-OFF-TIGHT]  55.63,35.81 0 top
H28  STAND-OFFTIGHT  [STAND-OFF-TIGHT]  35.31,35.81 0 top
H29  STAND-OFFTIGHT  [STAND-OFF-TIGHT]  81.53,35.81 0 top
H30  STAND-OFFTIGHT  [STAND-OFF-TIGHT]  61.21,35.81 0 top
H31  STAND-OFFTIGHT  [STAND-OFF-TIGHT]  107.44,35.81 0 top
H32  STAND-OFFTIGHT  [STAND-OFF-TIGHT]  87.12,35.81 0 top
H33  STAND-OFFTIGHT  [STAND-OFF-TIGHT]  133.35,35.81 0 top
H34  STAND-OFFTIGHT  [STAND-OFF-TIGHT]  113.03,35.81 0 top
H35  STAND-OFFTIGHT  [STAND-OFF-TIGHT]  159.26,35.81 0 top
H36  STAND-OFFTIGHT  [STAND-OFF-TIGHT]  138.94,35.81 0 top
H37  STAND-OFFTIGHT  [STAND-OFF-TIGHT]  29.72,49.02 0 top
H38  STAND-OFFTIGHT  [STAND-OFF-TIGHT]  9.4,49.02 0 top
H39  STAND-OFFTIGHT  [STAND-OFF-TIGHT]  55.63,49.02 0 top
H40  STAND-OFFTIGHT  [STAND-OFF-TIGHT]  35.31,49.02 0 top
H41  STAND-OFFTIGHT  [STAND-OFF-TIGHT]  81.53,49.02 0 top
H42  STAND-OFFTIGHT  [STAND-OFF-TIGHT]  61.21,49.02 0 top
H43  STAND-OFFTIGHT  [STAND-OFF-TIGHT]  107.44,49.02 0 top
H44  STAND-OFFTIGHT  [STAND-OFF-TIGHT]  87.12,49.02 0 top
H45  STAND-OFFTIGHT  [STAND-OFF-TIGHT]  133.35,49.02 0 top
H46  STAND-OFFTIGHT  [STAND-OFF-TIGHT]  113.03,49.02 0 top
H47  STAND-OFFTIGHT  [STAND-OFF-TIGHT]  159.26,49.02 0 top
H48  STAND-OFFTIGHT  [STAND-OFF-TIGHT]  138.94,49.02 0 top
H49  STAND-OFFTIGHT  [STAND-OFF-TIGHT]  29.72,62.23 0 top
H50  STAND-OFFTIGHT  [STAND-OFF-TIGHT]  9.4,62.23 0 top
H51  STAND-OFFTIGHT  [STAND-OFF-TIGHT]  55.63,62.23 0 top
H52  STAND-OFFTIGHT  [STAND-OFF-TIGHT]  35.31,62.23 0 top
H53  STAND-OFFTIGHT  [STAND-OFF-TIGHT]  81.53,62.23 0 top
H54  STAND-OFFTIGHT  [STAND-OFF-TIGHT]  61.21,62.23 0 top
H55  STAND-OFFTIGHT  [STAND-OFF-TIGHT]  107.44,62.23 0 top
H56  STAND-OFFTIGHT  [STAND-OFF-TIGHT]  87.12,62.23 0 top
H57  STAND-OFFTIGHT  [STAND-OFF-TIGHT]  133.35,62.23 0 top
H58  STAND-OFFTIGHT  [STAND-OFF-TIGHT]  113.03,62.23 0 top
H59  STAND-OFFTIGHT  [STAND-OFF-TIGHT]  159.26,62.23 0 top
H60  STAND-OFFTIGHT  [STAND-OFF-TIGHT]  138.94,62.23 0 top
H61  STAND-OFFTIGHT  [STAND-OFF-TIGHT]  29.72,75.44 0 top
H62  STAND-OFFTIGHT  [STAND-OFF-TIGHT]  9.4,75.44 0 top
H63  STAND-OFFTIGHT  [STAND-OFF-TIGHT]  55.63,75.44 0 top
H64  STAND-OFFTIGHT  [STAND-OFF-TIGHT]  35.31,75.44 0 top
H65  STAND-OFFTIGHT  [STAND-OFF-TIGHT]  81.53,75.44 0 top
H66  STAND-OFFTIGHT  [STAND-OFF-TIGHT]  61.21,75.44 0 top
H67  STAND-OFFTIGHT  [STAND-OFF-TIGHT]  107.44,75.44 0 top
H68  STAND-OFFTIGHT  [STAND-OFF-TIGHT]  87.12,75.44 0 top
H69  STAND-OFFTIGHT  [STAND-OFF-TIGHT]  133.35,75.44 0 top
H70  STAND-OFFTIGHT  [STAND-OFF-TIGHT]  113.03,75.44 0 top
H71  STAND-OFFTIGHT  [STAND-OFF-TIGHT]  159.26,75.44 0 top
H72  STAND-OFFTIGHT  [STAND-OFF-TIGHT]  138.94,75.44 0 top
H73  STAND-OFFTIGHT  [STAND-OFF-TIGHT]  29.72,88.65 0 top
H74  STAND-OFFTIGHT  [STAND-OFF-TIGHT]  9.4,88.65 0 top
H75  STAND-OFFTIGHT  [STAND-OFF-TIGHT]  55.63,88.65 0 top
H76  STAND-OFFTIGHT  [STAND-OFF-TIGHT]  35.31,88.65 0 top
H77  STAND-OFFTIGHT  [STAND-OFF-TIGHT]  81.53,88.65 0 top
H78  STAND-OFFTIGHT  [STAND-OFF-TIGHT]  61.21,88.65 0 top
H79  STAND-OFFTIGHT  [STAND-OFF-TIGHT]  107.44,88.65 0 top
H80  STAND-OFFTIGHT  [STAND-OFF-TIGHT]  87.12,88.65 0 top
H81  STAND-OFFTIGHT  [STAND-OFF-TIGHT]  133.35,88.65 0 top
H82  STAND-OFFTIGHT  [STAND-OFF-TIGHT]  113.03,88.65 0 top
H83  STAND-OFFTIGHT  [STAND-OFF-TIGHT]  159.26,88.65 0 top
H84  STAND-OFFTIGHT  [STAND-OFF-TIGHT]  138.94,88.65 0 top
H85  STAND-OFFTIGHT  [STAND-OFF-TIGHT]  29.72,101.85 0 top
H86  STAND-OFFTIGHT  [STAND-OFF-TIGHT]  9.4,101.85 0 top
H87  STAND-OFFTIGHT  [STAND-OFF-TIGHT]  55.63,101.85 0 top
H88  STAND-OFFTIGHT  [STAND-OFF-TIGHT]  35.31,101.85 0 top
H89  STAND-OFFTIGHT  [STAND-OFF-TIGHT]  81.53,101.85 0 top
H90  STAND-OFFTIGHT  [STAND-OFF-TIGHT]  61.21,101.85 0 top
H91  STAND-OFFTIGHT  [STAND-OFF-TIGHT]  107.44,101.85 0 top
H92  STAND-OFFTIGHT  [STAND-OFF-TIGHT]  87.12,101.85 0 top
H93  STAND-OFFTIGHT  [STAND-OFF-TIGHT]  133.35,101.85 0 top
H94  STAND-OFFTIGHT  [STAND-OFF-TIGHT]  113.03,101.85 0 top
H95  STAND-OFFTIGHT  [STAND-OFF-TIGHT]  159.26,101.85 0 top
H96  STAND-OFFTIGHT  [STAND-OFF-TIGHT]  138.94,101.85 0 top
H97  STAND-OFFTIGHT  [STAND-OFF-TIGHT]  29.72,115.06 0 top
H98  STAND-OFFTIGHT  [STAND-OFF-TIGHT]  9.4,115.06 0 top
H99  STAND-OFFTIGHT  [STAND-OFF-TIGHT]  55.63,115.06 0 top
H100  STAND-OFFTIGHT  [STAND-OFF-TIGHT]  35.31,115.06 0 top
H101  STAND-OFFTIGHT  [STAND-OFF-TIGHT]  81.53,115.06 0 top
H102  STAND-OFFTIGHT  [STAND-OFF-TIGHT]  61.21,115.06 0 top
H103  STAND-OFFTIGHT  [STAND-OFF-TIGHT]  107.44,115.06 0 top
H104  STAND-OFFTIGHT  [STAND-OFF-TIGHT]  87.12,115.06 0 top
H105  STAND-OFFTIGHT  [STAND-OFF-TIGHT]  133.35,115.06 0 top
H106  STAND-OFFTIGHT  [STAND-OFF-TIGHT]  113.03,115.06 0 top
H107  STAND-OFFTIGHT  [STAND-OFF-TIGHT]  159.26,115.06 0 top
H108  STAND-OFFTIGHT  [STAND-OFF-TIGHT]  138.94,115.06 0 top
I2C  I2C_PU  [SMT-JUMPER_3_2-NC_TRACE_SILK]  24.64,14.35 270 top
I2C1  I2C_PU  [SMT-JUMPER_3_2-NC_TRACE_SILK]  50.55,14.35 270 top
I2C2  I2C_PU  [SMT-JUMPER_3_2-NC_TRACE_SILK]  76.45,14.35 270 top
I2C3  I2C_PU  [SMT-JUMPER_3_2-NC_TRACE_SILK]  102.36,14.35 270 top
I2C4  I2C_PU  [SMT-JUMPER_3_2-NC_TRACE_SILK]  128.27,14.35 270 top
I2C5  I2C_PU  [SMT-JUMPER_3_2-NC_TRACE_SILK]  154.18,14.35 270 top
I2C6  I2C_PU  [SMT-JUMPER_3_2-NC_TRACE_SILK]  24.64,27.56 270 top
I2C7  I2C_PU  [SMT-JUMPER_3_2-NC_TRACE_SILK]  50.55,27.56 270 top
I2C8  I2C_PU  [SMT-JUMPER_3_2-NC_TRACE_SILK]  76.45,27.56 270 top
I2C9  I2C_PU  [SMT-JUMPER_3_2-NC_TRACE_SILK]  102.36,27.56 270 top
I2C10  I2C_PU  [SMT-JUMPER_3_2-NC_TRACE_SILK]  128.27,27.56 270 top
I2C11  I2C_PU  [SMT-JUMPER_3_2-NC_TRACE_SILK]  154.18,27.56 270 top
I2C12  I2C_PU  [SMT-JUMPER_3_2-NC_TRACE_SILK]  24.64,40.77 270 top
I2C13  I2C_PU  [SMT-JUMPER_3_2-NC_TRACE_SILK]  50.55,40.77 270 top
I2C14  I2C_PU  [SMT-JUMPER_3_2-NC_TRACE_SILK]  76.45,40.77 270 top
I2C15  I2C_PU  [SMT-JUMPER_3_2-NC_TRACE_SILK]  102.36,40.77 270 top
I2C16  I2C_PU  [SMT-JUMPER_3_2-NC_TRACE_SILK]  128.27,40.77 270 top
I2C17  I2C_PU  [SMT-JUMPER_3_2-NC_TRACE_SILK]  154.18,40.77 270 top
I2C18  I2C_PU  [SMT-JUMPER_3_2-NC_TRACE_SILK]  24.64,53.97 270 top
I2C19  I2C_PU  [SMT-JUMPER_3_2-NC_TRACE_SILK]  50.55,53.97 270 top
I2C20  I2C_PU  [SMT-JUMPER_3_2-NC_TRACE_SILK]  76.45,53.97 270 top
I2C21  I2C_PU  [SMT-JUMPER_3_2-NC_TRACE_SILK]  102.36,53.97 270 top
I2C22  I2C_PU  [SMT-JUMPER_3_2-NC_TRACE_SILK]  128.27,53.97 270 top
I2C23  I2C_PU  [SMT-JUMPER_3_2-NC_TRACE_SILK]  154.18,53.97 270 top
I2C24  I2C_PU  [SMT-JUMPER_3_2-NC_TRACE_SILK]  24.64,67.18 270 top
I2C25  I2C_PU  [SMT-JUMPER_3_2-NC_TRACE_SILK]  50.55,67.18 270 top
I2C26  I2C_PU  [SMT-JUMPER_3_2-NC_TRACE_SILK]  76.45,67.18 270 top
I2C27  I2C_PU  [SMT-JUMPER_3_2-NC_TRACE_SILK]  102.36,67.18 270 top
I2C28  I2C_PU  [SMT-JUMPER_3_2-NC_TRACE_SILK]  128.27,67.18 270 top
I2C29  I2C_PU  [SMT-JUMPER_3_2-NC_TRACE_SILK]  154.18,67.18 270 top
I2C30  I2C_PU  [SMT-JUMPER_3_2-NC_TRACE_SILK]  24.64,80.39 270 top
I2C31  I2C_PU  [SMT-JUMPER_3_2-NC_TRACE_SILK]  50.55,80.39 270 top
I2C32  I2C_PU  [SMT-JUMPER_3_2-NC_TRACE_SILK]  76.45,80.39 270 top
I2C33  I2C_PU  [SMT-JUMPER_3_2-NC_TRACE_SILK]  102.36,80.39 270 top
I2C34  I2C_PU  [SMT-JUMPER_3_2-NC_TRACE_SILK]  128.27,80.39 270 top
I2C35  I2C_PU  [SMT-JUMPER_3_2-NC_TRACE_SILK]  154.18,80.39 270 top
I2C36  I2C_PU  [SMT-JUMPER_3_2-NC_TRACE_SILK]  24.64,93.6 270 top
I2C37  I2C_PU  [SMT-JUMPER_3_2-NC_TRACE_SILK]  50.55,93.6 270 top
I2C38  I2C_PU  [SMT-JUMPER_3_2-NC_TRACE_SILK]  76.45,93.6 270 top
I2C39  I2C_PU  [SMT-JUMPER_3_2-NC_TRACE_SILK]  102.36,93.6 270 top
I2C40  I2C_PU  [SMT-JUMPER_3_2-NC_TRACE_SILK]  128.27,93.6 270 top
I2C41  I2C_PU  [SMT-JUMPER_3_2-NC_TRACE_SILK]  154.18,93.6 270 top
I2C42  I2C_PU  [SMT-JUMPER_3_2-NC_TRACE_SILK]  24.64,106.81 270 top
I2C43  I2C_PU  [SMT-JUMPER_3_2-NC_TRACE_SILK]  50.55,106.81 270 top
I2C44  I2C_PU  [SMT-JUMPER_3_2-NC_TRACE_SILK]  76.45,106.81 270 top
I2C45  I2C_PU  [SMT-JUMPER_3_2-NC_TRACE_SILK]  102.36,106.81 270 top
I2C46  I2C_PU  [SMT-JUMPER_3_2-NC_TRACE_SILK]  128.27,106.81 270 top
I2C47  I2C_PU  [SMT-JUMPER_3_2-NC_TRACE_SILK]  154.18,106.81 270 top
I2C48  I2C_PU  [SMT-JUMPER_3_2-NC_TRACE_SILK]  24.64,120.02 270 top
I2C49  I2C_PU  [SMT-JUMPER_3_2-NC_TRACE_SILK]  50.55,120.02 270 top
I2C50  I2C_PU  [SMT-JUMPER_3_2-NC_TRACE_SILK]  76.45,120.02 270 top
I2C51  I2C_PU  [SMT-JUMPER_3_2-NC_TRACE_SILK]  102.36,120.02 270 top
I2C52  I2C_PU  [SMT-JUMPER_3_2-NC_TRACE_SILK]  128.27,120.02 270 top
I2C53  I2C_PU  [SMT-JUMPER_3_2-NC_TRACE_SILK]  154.18,120.02 270 top
J1  QWIIC_RIGHT_ANGLE  [JST04_1MM_RA]  53.09,15.75 90 top
J2  [1X02_NO_SILK]  25.91,8.13 180 top
J3  [1X02_NO_SILK]  18.29,18.29 0 top
J4  QWIIC_RIGHT_ANGLE  [JST04_1MM_RA]  27.18,15.75 90 top
J5  QWIIC_RIGHT_ANGLE  [JST04_1MM_RA]  11.94,15.75 270 top
J6  [1X04_NO_SILK]  13.21,8.13 0 top
J7  QWIIC_RIGHT_ANGLE  [JST04_1MM_RA]  37.85,15.75 270 top
J8  [1X04_NO_SILK]  39.12,8.13 0 top
J9  [1X02_NO_SILK]  51.82,8.13 180 top
J10  [1X02_NO_SILK]  44.2,18.29 0 top
J11  QWIIC_RIGHT_ANGLE  [JST04_1MM_RA]  78.99,15.75 90 top
J12  QWIIC_RIGHT_ANGLE  [JST04_1MM_RA]  63.75,15.75 270 top
J13  [1X04_NO_SILK]  65.02,8.13 0 top
J14  [1X02_NO_SILK]  77.72,8.13 180 top
J15  [1X02_NO_SILK]  70.1,18.29 0 top
J16  QWIIC_RIGHT_ANGLE  [JST04_1MM_RA]  104.9,15.75 90 top
J17  QWIIC_RIGHT_ANGLE  [JST04_1MM_RA]  89.66,15.75 270 top
J18  [1X04_NO_SILK]  90.93,8.13 0 top
J19  [1X02_NO_SILK]  103.63,8.13 180 top
J20  [1X02_NO_SILK]  96.01,18.29 0 top
J21  QWIIC_RIGHT_ANGLE  [JST04_1MM_RA]  130.81,15.75 90 top
J22  QWIIC_RIGHT_ANGLE  [JST04_1MM_RA]  115.57,15.75 270 top
J23  [1X04_NO_SILK]  116.84,8.13 0 top
J24  [1X02_NO_SILK]  129.54,8.13 180 top
J25  [1X02_NO_SILK]  121.92,18.29 0 top
J26  QWIIC_RIGHT_ANGLE  [JST04_1MM_RA]  156.72,15.75 90 top
J27  QWIIC_RIGHT_ANGLE  [JST04_1MM_RA]  141.48,15.75 270 top
J28  [1X04_NO_SILK]  142.75,8.13 0 top
J29  [1X02_NO_SILK]  155.45,8.13 180 top
J30  [1X02_NO_SILK]  147.83,18.29 0 top
J31  QWIIC_RIGHT_ANGLE  [JST04_1MM_RA]  27.18,28.96 90 top
J32  QWIIC_RIGHT_ANGLE  [JST04_1MM_RA]  11.94,28.96 270 top
J33  [1X04_NO_SILK]  13.21,21.34 0 top
J34  [1X02_NO_SILK]  25.91,21.34 180 top
J35  [1X02_NO_SILK]  18.29,31.5 0 top
J36  QWIIC_RIGHT_ANGLE  [JST04_1MM_RA]  53.09,28.96 90 top
J37  QWIIC_RIGHT_ANGLE  [JST04_1MM_RA]  37.85,28.96 270 top
J38  [1X04_NO_SILK]  39.12,21.34 0 top
J39  [1X02_NO_SILK]  51.82,21.34 180 top
J40  [1X02_NO_SILK]  44.2,31.5 0 top
J41  QWIIC_RIGHT_ANGLE  [JST04_1MM_RA]  78.99,28.96 90 top
J42  QWIIC_RIGHT_ANGLE  [JST04_1MM_RA]  63.75,28.96 270 top
J43  [1X04_NO_SILK]  65.02,21.34 0 top
J44  [1X02_NO_SILK]  77.72,21.34 180 top
J45  [1X02_NO_SILK]  70.1,31.5 0 top
J46  QWIIC_RIGHT_ANGLE  [JST04_1MM_RA]  104.9,28.96 90 top
J47  QWIIC_RIGHT_ANGLE  [JST04_1MM_RA]  89.66,28.96 270 top
J48  [1X04_NO_SILK]  90.93,21.34 0 top
J49  [1X02_NO_SILK]  103.63,21.34 180 top
J50  [1X02_NO_SILK]  96.01,31.5 0 top
J51  QWIIC_RIGHT_ANGLE  [JST04_1MM_RA]  130.81,28.96 90 top
J52  QWIIC_RIGHT_ANGLE  [JST04_1MM_RA]  115.57,28.96 270 top
J53  [1X04_NO_SILK]  116.84,21.34 0 top
J54  [1X02_NO_SILK]  129.54,21.34 180 top
J55  [1X02_NO_SILK]  121.92,31.5 0 top
J56  QWIIC_RIGHT_ANGLE  [JST04_1MM_RA]  156.72,28.96 90 top
J57  QWIIC_RIGHT_ANGLE  [JST04_1MM_RA]  141.48,28.96 270 top
J58  [1X04_NO_SILK]  142.75,21.34 0 top
J59  [1X02_NO_SILK]  155.45,21.34 180 top
J60  [1X02_NO_SILK]  147.83,31.5 0 top
J61  QWIIC_RIGHT_ANGLE  [JST04_1MM_RA]  27.18,42.16 90 top
J62  QWIIC_RIGHT_ANGLE  [JST04_1MM_RA]  11.94,42.16 270 top
J63  [1X04_NO_SILK]  13.21,34.54 0 top
J64  [1X02_NO_SILK]  25.91,34.54 180 top
J65  [1X02_NO_SILK]  18.29,44.7 0 top
J66  QWIIC_RIGHT_ANGLE  [JST04_1MM_RA]  53.09,42.16 90 top
J67  QWIIC_RIGHT_ANGLE  [JST04_1MM_RA]  37.85,42.16 270 top
J68  [1X04_NO_SILK]  39.12,34.54 0 top
J69  [1X02_NO_SILK]  51.82,34.54 180 top
J70  [1X02_NO_SILK]  44.2,44.7 0 top
J71  QWIIC_RIGHT_ANGLE  [JST04_1MM_RA]  78.99,42.16 90 top
J72  QWIIC_RIGHT_ANGLE  [JST04_1MM_RA]  63.75,42.16 270 top
J73  [1X04_NO_SILK]  65.02,34.54 0 top
J74  [1X02_NO_SILK]  77.72,34.54 180 top
J75  [1X02_NO_SILK]  70.1,44.7 0 top
J76  QWIIC_RIGHT_ANGLE  [JST04_1MM_RA]  104.9,42.16 90 top
J77  QWIIC_RIGHT_ANGLE  [JST04_1MM_RA]  89.66,42.16 270 top
J78  [1X04_NO_SILK]  90.93,34.54 0 top
J79  [1X02_NO_SILK]  103.63,34.54 180 top
J80  [1X02_NO_SILK]  96.01,44.7 0 top
J81  QWIIC_RIGHT_ANGLE  [JST04_1MM_RA]  130.81,42.16 90 top
J82  QWIIC_RIGHT_ANGLE  [JST04_1MM_RA]  115.57,42.16 270 top
J83  [1X04_NO_SILK]  116.84,34.54 0 top
J84  [1X02_NO_SILK]  129.54,34.54 180 top
J85  [1X02_NO_SILK]  121.92,44.7 0 top
J86  QWIIC_RIGHT_ANGLE  [JST04_1MM_RA]  156.72,42.16 90 top
J87  QWIIC_RIGHT_ANGLE  [JST04_1MM_RA]  141.48,42.16 270 top
J88  [1X04_NO_SILK]  142.75,34.54 0 top
J89  [1X02_NO_SILK]  155.45,34.54 180 top
J90  [1X02_NO_SILK]  147.83,44.7 0 top
J91  QWIIC_RIGHT_ANGLE  [JST04_1MM_RA]  27.18,55.37 90 top
J92  QWIIC_RIGHT_ANGLE  [JST04_1MM_RA]  11.94,55.37 270 top
J93  [1X04_NO_SILK]  13.21,47.75 0 top
J94  [1X02_NO_SILK]  25.91,47.75 180 top
J95  [1X02_NO_SILK]  18.29,57.91 0 top
J96  QWIIC_RIGHT_ANGLE  [JST04_1MM_RA]  53.09,55.37 90 top
J97  QWIIC_RIGHT_ANGLE  [JST04_1MM_RA]  37.85,55.37 270 top
J98  [1X04_NO_SILK]  39.12,47.75 0 top
J99  [1X02_NO_SILK]  51.82,47.75 180 top
J100  [1X02_NO_SILK]  44.2,57.91 0 top
J101  QWIIC_RIGHT_ANGLE  [JST04_1MM_RA]  78.99,55.37 90 top
J102  QWIIC_RIGHT_ANGLE  [JST04_1MM_RA]  63.75,55.37 270 top
J103  [1X04_NO_SILK]  65.02,47.75 0 top
J104  [1X02_NO_SILK]  77.72,47.75 180 top
J105  [1X02_NO_SILK]  70.1,57.91 0 top
J106  QWIIC_RIGHT_ANGLE  [JST04_1MM_RA]  104.9,55.37 90 top
J107  QWIIC_RIGHT_ANGLE  [JST04_1MM_RA]  89.66,55.37 270 top
J108  [1X04_NO_SILK]  90.93,47.75 0 top
J109  [1X02_NO_SILK]  103.63,47.75 180 top
J110  [1X02_NO_SILK]  96.01,57.91 0 top
J111  QWIIC_RIGHT_ANGLE  [JST04_1MM_RA]  130.81,55.37 90 top
J112  QWIIC_RIGHT_ANGLE  [JST04_1MM_RA]  115.57,55.37 270 top
J113  [1X04_NO_SILK]  116.84,47.75 0 top
J114  [1X02_NO_SILK]  129.54,47.75 180 top
J115  [1X02_NO_SILK]  121.92,57.91 0 top
J116  QWIIC_RIGHT_ANGLE  [JST04_1MM_RA]  156.72,55.37 90 top
J117  QWIIC_RIGHT_ANGLE  [JST04_1MM_RA]  141.48,55.37 270 top
J118  [1X04_NO_SILK]  142.75,47.75 0 top
J119  [1X02_NO_SILK]  155.45,47.75 180 top
J120  [1X02_NO_SILK]  147.83,57.91 0 top
J121  QWIIC_RIGHT_ANGLE  [JST04_1MM_RA]  27.18,68.58 90 top
J122  QWIIC_RIGHT_ANGLE  [JST04_1MM_RA]  11.94,68.58 270 top
J123  [1X04_NO_SILK]  13.21,60.96 0 top
J124  [1X02_NO_SILK]  25.91,60.96 180 top
J125  [1X02_NO_SILK]  18.29,71.12 0 top
J126  QWIIC_RIGHT_ANGLE  [JST04_1MM_RA]  53.09,68.58 90 top
J127  QWIIC_RIGHT_ANGLE  [JST04_1MM_RA]  37.85,68.58 270 top
J128  [1X04_NO_SILK]  39.12,60.96 0 top
J129  [1X02_NO_SILK]  51.82,60.96 180 top
J130  [1X02_NO_SILK]  44.2,71.12 0 top
J131  QWIIC_RIGHT_ANGLE  [JST04_1MM_RA]  78.99,68.58 90 top
J132  QWIIC_RIGHT_ANGLE  [JST04_1MM_RA]  63.75,68.58 270 top
J133  [1X04_NO_SILK]  65.02,60.96 0 top
J134  [1X02_NO_SILK]  77.72,60.96 180 top
J135  [1X02_NO_SILK]  70.1,71.12 0 top
J136  QWIIC_RIGHT_ANGLE  [JST04_1MM_RA]  104.9,68.58 90 top
J137  QWIIC_RIGHT_ANGLE  [JST04_1MM_RA]  89.66,68.58 270 top
J138  [1X04_NO_SILK]  90.93,60.96 0 top
J139  [1X02_NO_SILK]  103.63,60.96 180 top
J140  [1X02_NO_SILK]  96.01,71.12 0 top
J141  QWIIC_RIGHT_ANGLE  [JST04_1MM_RA]  130.81,68.58 90 top
J142  QWIIC_RIGHT_ANGLE  [JST04_1MM_RA]  115.57,68.58 270 top
J143  [1X04_NO_SILK]  116.84,60.96 0 top
J144  [1X02_NO_SILK]  129.54,60.96 180 top
J145  [1X02_NO_SILK]  121.92,71.12 0 top
J146  QWIIC_RIGHT_ANGLE  [JST04_1MM_RA]  156.72,68.58 90 top
J147  QWIIC_RIGHT_ANGLE  [JST04_1MM_RA]  141.48,68.58 270 top
J148  [1X04_NO_SILK]  142.75,60.96 0 top
J149  [1X02_NO_SILK]  155.45,60.96 180 top
J150  [1X02_NO_SILK]  147.83,71.12 0 top
J151  QWIIC_RIGHT_ANGLE  [JST04_1MM_RA]  27.18,81.79 90 top
J152  QWIIC_RIGHT_ANGLE  [JST04_1MM_RA]  11.94,81.79 270 top
J153  [1X04_NO_SILK]  13.21,74.17 0 top
J154  [1X02_NO_SILK]  25.91,74.17 180 top
J155  [1X02_NO_SILK]  18.29,84.33 0 top
J156  QWIIC_RIGHT_ANGLE  [JST04_1MM_RA]  53.09,81.79 90 top
J157  QWIIC_RIGHT_ANGLE  [JST04_1MM_RA]  37.85,81.79 270 top
J158  [1X04_NO_SILK]  39.12,74.17 0 top
J159  [1X02_NO_SILK]  51.82,74.17 180 top
J160  [1X02_NO_SILK]  44.2,84.33 0 top
J161  QWIIC_RIGHT_ANGLE  [JST04_1MM_RA]  78.99,81.79 90 top
J162  QWIIC_RIGHT_ANGLE  [JST04_1MM_RA]  63.75,81.79 270 top
J163  [1X04_NO_SILK]  65.02,74.17 0 top
J164  [1X02_NO_SILK]  77.72,74.17 180 top
J165  [1X02_NO_SILK]  70.1,84.33 0 top
J166  QWIIC_RIGHT_ANGLE  [JST04_1MM_RA]  104.9,81.79 90 top
J167  QWIIC_RIGHT_ANGLE  [JST04_1MM_RA]  89.66,81.79 270 top
J168  [1X04_NO_SILK]  90.93,74.17 0 top
J169  [1X02_NO_SILK]  103.63,74.17 180 top
J170  [1X02_NO_SILK]  96.01,84.33 0 top
J171  QWIIC_RIGHT_ANGLE  [JST04_1MM_RA]  130.81,81.79 90 top
J172  QWIIC_RIGHT_ANGLE  [JST04_1MM_RA]  115.57,81.79 270 top
J173  [1X04_NO_SILK]  116.84,74.17 0 top
J174  [1X02_NO_SILK]  129.54,74.17 180 top
J175  [1X02_NO_SILK]  121.92,84.33 0 top
J176  QWIIC_RIGHT_ANGLE  [JST04_1MM_RA]  156.72,81.79 90 top
J177  QWIIC_RIGHT_ANGLE  [JST04_1MM_RA]  141.48,81.79 270 top
J178  [1X04_NO_SILK]  142.75,74.17 0 top
J179  [1X02_NO_SILK]  155.45,74.17 180 top
J180  [1X02_NO_SILK]  147.83,84.33 0 top
J181  QWIIC_RIGHT_ANGLE  [JST04_1MM_RA]  27.18,95 90 top
J182  QWIIC_RIGHT_ANGLE  [JST04_1MM_RA]  11.94,95 270 top
J183  [1X04_NO_SILK]  13.21,87.38 0 top
J184  [1X02_NO_SILK]  25.91,87.38 180 top
J185  [1X02_NO_SILK]  18.29,97.54 0 top
J186  QWIIC_RIGHT_ANGLE  [JST04_1MM_RA]  53.09,95 90 top
J187  QWIIC_RIGHT_ANGLE  [JST04_1MM_RA]  37.85,95 270 top
J188  [1X04_NO_SILK]  39.12,87.38 0 top
J189  [1X02_NO_SILK]  51.82,87.38 180 top
J190  [1X02_NO_SILK]  44.2,97.54 0 top
J191  QWIIC_RIGHT_ANGLE  [JST04_1MM_RA]  78.99,95 90 top
J192  QWIIC_RIGHT_ANGLE  [JST04_1MM_RA]  63.75,95 270 top
J193  [1X04_NO_SILK]  65.02,87.38 0 top
J194  [1X02_NO_SILK]  77.72,87.38 180 top
J195  [1X02_NO_SILK]  70.1,97.54 0 top
J196  QWIIC_RIGHT_ANGLE  [JST04_1MM_RA]  104.9,95 90 top
J197  QWIIC_RIGHT_ANGLE  [JST04_1MM_RA]  89.66,95 270 top
J198  [1X04_NO_SILK]  90.93,87.38 0 top
J199  [1X02_NO_SILK]  103.63,87.38 180 top
J200  [1X02_NO_SILK]  96.01,97.54 0 top
J201  QWIIC_RIGHT_ANGLE  [JST04_1MM_RA]  130.81,95 90 top
J202  QWIIC_RIGHT_ANGLE  [JST04_1MM_RA]  115.57,95 270 top
J203  [1X04_NO_SILK]  116.84,87.38 0 top
J204  [1X02_NO_SILK]  129.54,87.38 180 top
J205  [1X02_NO_SILK]  121.92,97.54 0 top
J206  QWIIC_RIGHT_ANGLE  [JST04_1MM_RA]  156.72,95 90 top
J207  QWIIC_RIGHT_ANGLE  [JST04_1MM_RA]  141.48,95 270 top
J208  [1X04_NO_SILK]  142.75,87.38 0 top
J209  [1X02_NO_SILK]  155.45,87.38 180 top
J210  [1X02_NO_SILK]  147.83,97.54 0 top
J211  QWIIC_RIGHT_ANGLE  [JST04_1MM_RA]  27.18,108.2 90 top
J212  QWIIC_RIGHT_ANGLE  [JST04_1MM_RA]  11.94,108.2 270 top
J213  [1X04_NO_SILK]  13.21,100.58 0 top
J214  [1X02_NO_SILK]  25.91,100.58 180 top
J215  [1X02_NO_SILK]  18.29,110.74 0 top
J216  QWIIC_RIGHT_ANGLE  [JST04_1MM_RA]  53.09,108.2 90 top
J217  QWIIC_RIGHT_ANGLE  [JST04_1MM_RA]  37.85,108.2 270 top
J218  [1X04_NO_SILK]  39.12,100.58 0 top
J219  [1X02_NO_SILK]  51.82,100.58 180 top
J220  [1X02_NO_SILK]  44.2,110.74 0 top
J221  QWIIC_RIGHT_ANGLE  [JST04_1MM_RA]  78.99,108.2 90 top
J222  QWIIC_RIGHT_ANGLE  [JST04_1MM_RA]  63.75,108.2 270 top
J223  [1X04_NO_SILK]  65.02,100.58 0 top
J224  [1X02_NO_SILK]  77.72,100.58 180 top
J225  [1X02_NO_SILK]  70.1,110.74 0 top
J226  QWIIC_RIGHT_ANGLE  [JST04_1MM_RA]  104.9,108.2 90 top
J227  QWIIC_RIGHT_ANGLE  [JST04_1MM_RA]  89.66,108.2 270 top